# EAGLE board TXB0104_breakout_Panel_v10 (EAGLE 7.4.0), part 1 of 6
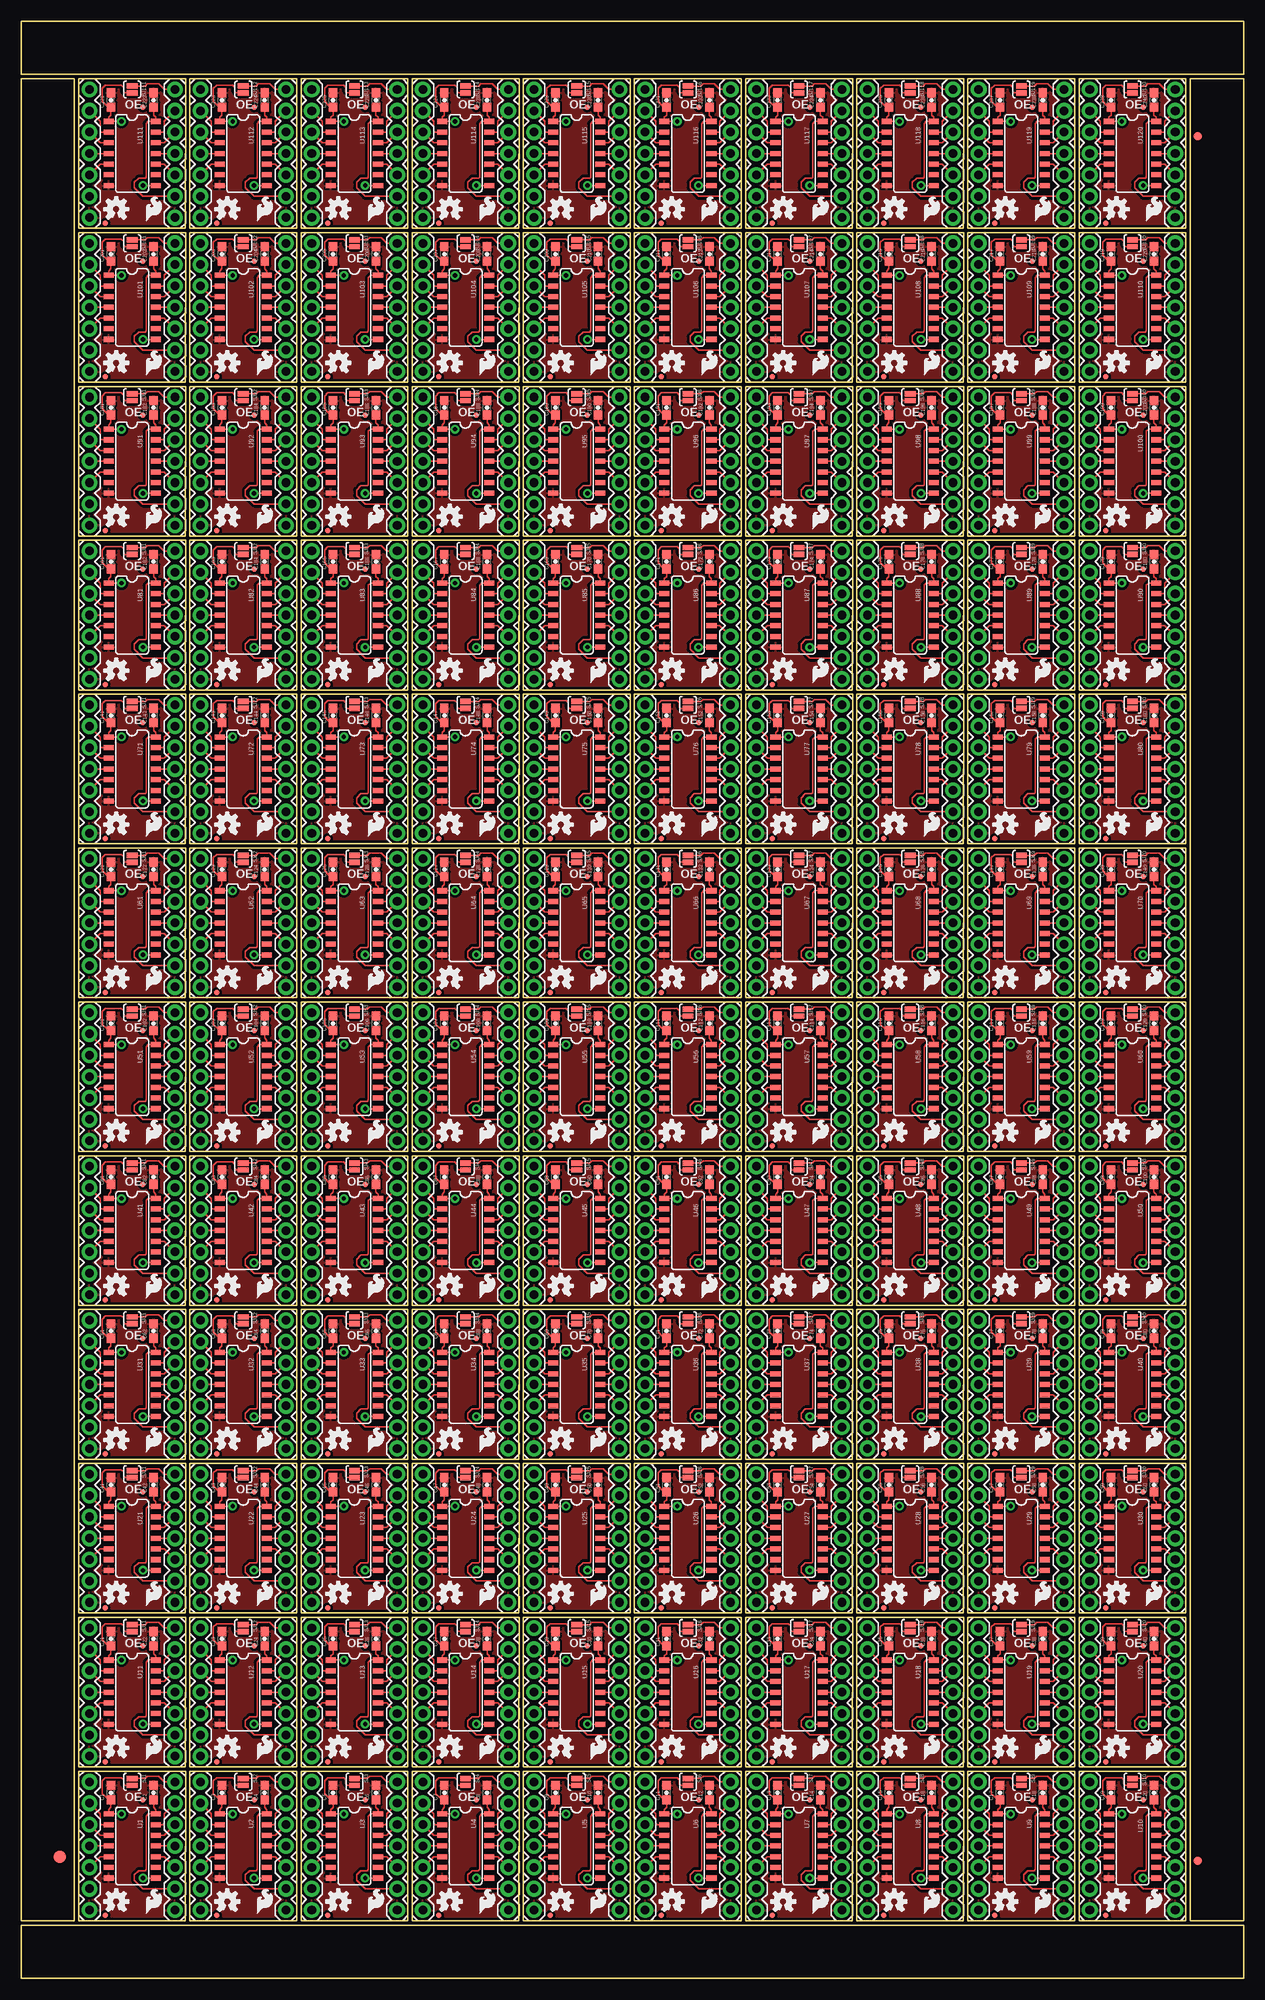
[diagram p0: board, top side]
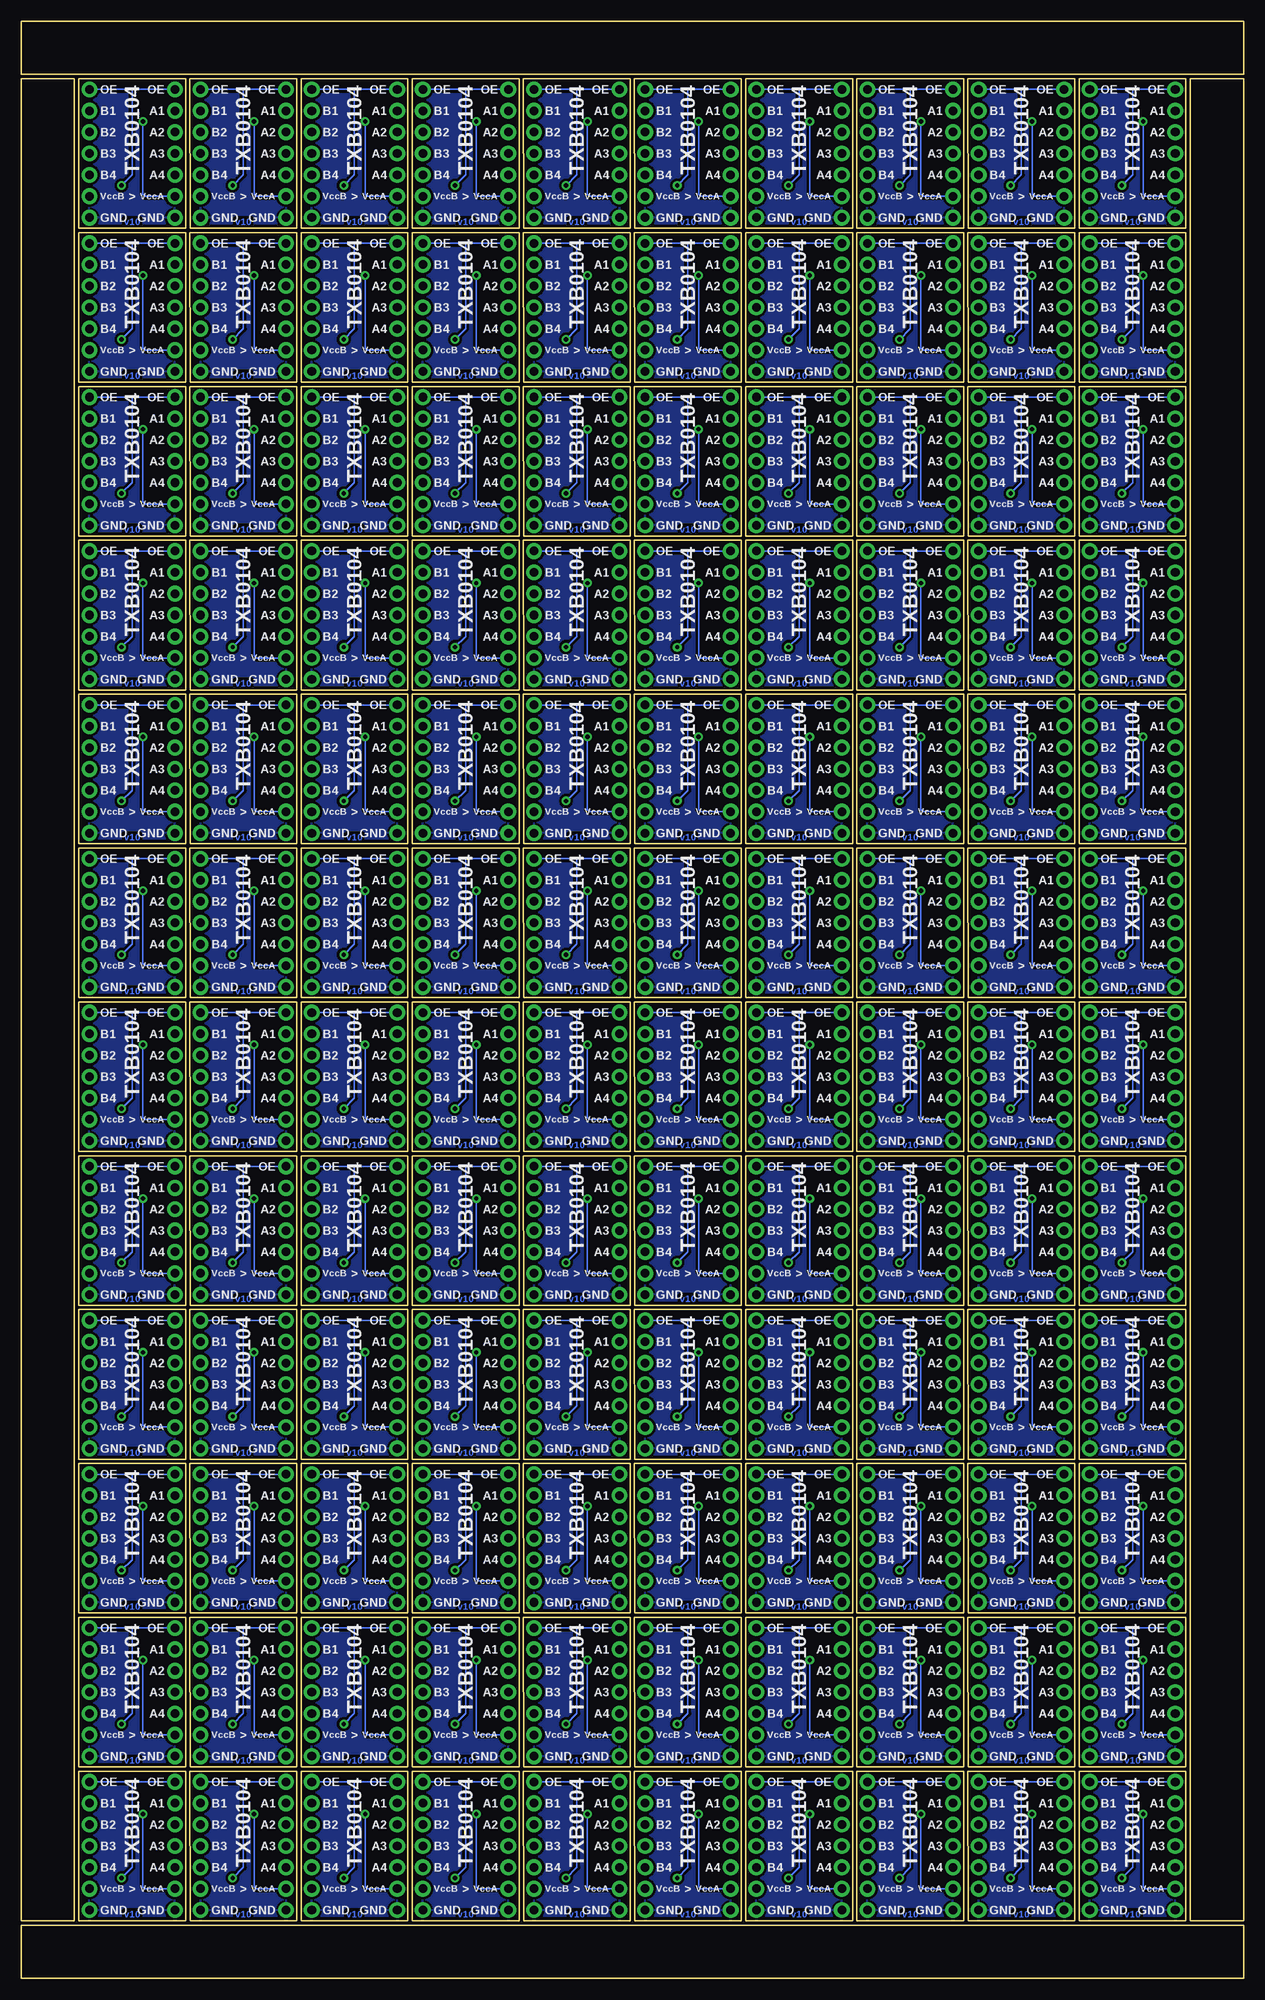
[diagram p1: board, bottom side, seen from below]

Size 145.29 x 232.66 mm. Coordinates in mm from the lower left corner, seen from the top.
Outline: 504 segments
Copper layers (1*16): Top 0.035mm / dielectric 1.5mm / Bottom 0.035mm
Design rules "Sparkfun": minimum track width 8mil, minimum drill 20mil, track to track 8mil, track to pad 8mil, pad to pad 8mil, via to via 8mil, smd to smd 8mil, copper to edge 8mil, drill to drill 8mil, minimum pad ring 12mil, minimum via ring 10mil, stop-mask expansion 4mil, vias tented up to drill 20mil, thermal gap 10mil

## Footprints (pad centres in the part's own frame; a part is rotated, then mirrored left to right if it is on the bottom)
0603-CAP = smd 1.1 x 1: 1 -0.85,0; 2 0.85,0
FIDUCIAL-1.5X3 = smd 1.5 x 1.5: 1 0,0
FIDUCIAL-1X2 = smd 1 x 1: 1 0,0
MICRO-FIDUCIAL = smd 0.635 x 0.635: 1 0,0
1X07 = drill 1.016 pad 1.88: 1 0,0; 2 2.54,0; 3 5.08,0; 4 7.62,0; 5 10.16,0; 6 12.7,0; 7 15.24,0
SJ_2S-NOTRACE = smd 0.635 x 1.27: 1 -0.401,0; 2 0.413,0
SO14 = smd 0.6 x 1.2: 1 -3.81,-2.8; 2 -2.54,-2.8; 3 -1.27,-2.8; 4 0,-2.8; 5 1.27,-2.8; 6 2.54,-2.8; 7 3.81,-2.8; 8 3.81,2.8; 9 2.54,2.8; 10 1.27,2.8; 11 0,2.8; 12 -1.27,2.8; 13 -2.54,2.8; 14 -3.81,2.8

## Placement (x,y rotation side)
C1  0.1uF  [0603-CAP]  10.67,22.1 90 top
C2  0.1uF  [0603-CAP]  15.75,22.1 90 top
C3  0.1uF  [0603-CAP]  23.88,22.1 90 top
C4  0.1uF  [0603-CAP]  28.96,22.1 90 top
C5  0.1uF  [0603-CAP]  37.08,22.1 90 top
C6  0.1uF  [0603-CAP]  42.16,22.1 90 top
C7  0.1uF  [0603-CAP]  50.29,22.1 90 top
C8  0.1uF  [0603-CAP]  55.37,22.1 90 top
C9  0.1uF  [0603-CAP]  63.5,22.1 90 top
C10  0.1uF  [0603-CAP]  68.58,22.1 90 top
C11  0.1uF  [0603-CAP]  76.71,22.1 90 top
C12  0.1uF  [0603-CAP]  81.79,22.1 90 top
C13  0.1uF  [0603-CAP]  89.92,22.1 90 top
C14  0.1uF  [0603-CAP]  95,22.1 90 top
C15  0.1uF  [0603-CAP]  103.12,22.1 90 top
C16  0.1uF  [0603-CAP]  108.2,22.1 90 top
C17  0.1uF  [0603-CAP]  116.33,22.1 90 top
C18  0.1uF  [0603-CAP]  121.41,22.1 90 top
C19  0.1uF  [0603-CAP]  129.54,22.1 90 top
C20  0.1uF  [0603-CAP]  134.62,22.1 90 top
C21  0.1uF  [0603-CAP]  10.67,40.39 90 top
C22  0.1uF  [0603-CAP]  15.75,40.39 90 top
C23  0.1uF  [0603-CAP]  23.88,40.39 90 top
C24  0.1uF  [0603-CAP]  28.96,40.39 90 top
C25  0.1uF  [0603-CAP]  37.08,40.39 90 top
C26  0.1uF  [0603-CAP]  42.16,40.39 90 top
C27  0.1uF  [0603-CAP]  50.29,40.39 90 top
C28  0.1uF  [0603-CAP]  55.37,40.39 90 top
C29  0.1uF  [0603-CAP]  63.5,40.39 90 top
C30  0.1uF  [0603-CAP]  68.58,40.39 90 top
C31  0.1uF  [0603-CAP]  76.71,40.39 90 top
C32  0.1uF  [0603-CAP]  81.79,40.39 90 top
C33  0.1uF  [0603-CAP]  89.92,40.39 90 top
C34  0.1uF  [0603-CAP]  95,40.39 90 top
C35  0.1uF  [0603-CAP]  103.12,40.39 90 top
C36  0.1uF  [0603-CAP]  108.2,40.39 90 top
C37  0.1uF  [0603-CAP]  116.33,40.39 90 top
C38  0.1uF  [0603-CAP]  121.41,40.39 90 top
C39  0.1uF  [0603-CAP]  129.54,40.39 90 top
C40  0.1uF  [0603-CAP]  134.62,40.39 90 top
C41  0.1uF  [0603-CAP]  10.67,58.67 90 top
C42  0.1uF  [0603-CAP]  15.75,58.67 90 top
C43  0.1uF  [0603-CAP]  23.88,58.67 90 top
C44  0.1uF  [0603-CAP]  28.96,58.67 90 top
C45  0.1uF  [0603-CAP]  37.08,58.67 90 top
C46  0.1uF  [0603-CAP]  42.16,58.67 90 top
C47  0.1uF  [0603-CAP]  50.29,58.67 90 top
C48  0.1uF  [0603-CAP]  55.37,58.67 90 top
C49  0.1uF  [0603-CAP]  63.5,58.67 90 top
C50  0.1uF  [0603-CAP]  68.58,58.67 90 top
C51  0.1uF  [0603-CAP]  76.71,58.67 90 top
C52  0.1uF  [0603-CAP]  81.79,58.67 90 top
C53  0.1uF  [0603-CAP]  89.92,58.67 90 top
C54  0.1uF  [0603-CAP]  95,58.67 90 top
C55  0.1uF  [0603-CAP]  103.12,58.67 90 top
C56  0.1uF  [0603-CAP]  108.2,58.67 90 top
C57  0.1uF  [0603-CAP]  116.33,58.67 90 top
C58  0.1uF  [0603-CAP]  121.41,58.67 90 top
C59  0.1uF  [0603-CAP]  129.54,58.67 90 top
C60  0.1uF  [0603-CAP]  134.62,58.67 90 top
C61  0.1uF  [0603-CAP]  10.67,76.96 90 top
C62  0.1uF  [0603-CAP]  15.75,76.96 90 top
C63  0.1uF  [0603-CAP]  23.88,76.96 90 top
C64  0.1uF  [0603-CAP]  28.96,76.96 90 top
C65  0.1uF  [0603-CAP]  37.08,76.96 90 top
C66  0.1uF  [0603-CAP]  42.16,76.96 90 top
C67  0.1uF  [0603-CAP]  50.29,76.96 90 top
C68  0.1uF  [0603-CAP]  55.37,76.96 90 top
C69  0.1uF  [0603-CAP]  63.5,76.96 90 top
C70  0.1uF  [0603-CAP]  68.58,76.96 90 top
C71  0.1uF  [0603-CAP]  76.71,76.96 90 top
C72  0.1uF  [0603-CAP]  81.79,76.96 90 top
C73  0.1uF  [0603-CAP]  89.92,76.96 90 top
C74  0.1uF  [0603-CAP]  95,76.96 90 top
C75  0.1uF  [0603-CAP]  103.12,76.96 90 top
C76  0.1uF  [0603-CAP]  108.2,76.96 90 top
C77  0.1uF  [0603-CAP]  116.33,76.96 90 top
C78  0.1uF  [0603-CAP]  121.41,76.96 90 top
C79  0.1uF  [0603-CAP]  129.54,76.96 90 top
C80  0.1uF  [0603-CAP]  134.62,76.96 90 top
C81  0.1uF  [0603-CAP]  10.67,95.25 90 top
C82  0.1uF  [0603-CAP]  15.75,95.25 90 top
C83  0.1uF  [0603-CAP]  23.88,95.25 90 top
C84  0.1uF  [0603-CAP]  28.96,95.25 90 top
C85  0.1uF  [0603-CAP]  37.08,95.25 90 top
C86  0.1uF  [0603-CAP]  42.16,95.25 90 top
C87  0.1uF  [0603-CAP]  50.29,95.25 90 top
C88  0.1uF  [0603-CAP]  55.37,95.25 90 top
C89  0.1uF  [0603-CAP]  63.5,95.25 90 top
C90  0.1uF  [0603-CAP]  68.58,95.25 90 top
C91  0.1uF  [0603-CAP]  76.71,95.25 90 top
C92  0.1uF  [0603-CAP]  81.79,95.25 90 top
C93  0.1uF  [0603-CAP]  89.92,95.25 90 top
C94  0.1uF  [0603-CAP]  95,95.25 90 top
C95  0.1uF  [0603-CAP]  103.12,95.25 90 top
C96  0.1uF  [0603-CAP]  108.2,95.25 90 top
C97  0.1uF  [0603-CAP]  116.33,95.25 90 top
C98  0.1uF  [0603-CAP]  121.41,95.25 90 top
C99  0.1uF  [0603-CAP]  129.54,95.25 90 top
C100  0.1uF  [0603-CAP]  134.62,95.25 90 top
C101  0.1uF  [0603-CAP]  10.67,113.54 90 top
C102  0.1uF  [0603-CAP]  15.75,113.54 90 top
C103  0.1uF  [0603-CAP]  23.88,113.54 90 top
C104  0.1uF  [0603-CAP]  28.96,113.54 90 top
C105  0.1uF  [0603-CAP]  37.08,113.54 90 top
C106  0.1uF  [0603-CAP]  42.16,113.54 90 top
C107  0.1uF  [0603-CAP]  50.29,113.54 90 top
C108  0.1uF  [0603-CAP]  55.37,113.54 90 top
C109  0.1uF  [0603-CAP]  63.5,113.54 90 top
C110  0.1uF  [0603-CAP]  68.58,113.54 90 top
C111  0.1uF  [0603-CAP]  76.71,113.54 90 top
C112  0.1uF  [0603-CAP]  81.79,113.54 90 top
C113  0.1uF  [0603-CAP]  89.92,113.54 90 top
C114  0.1uF  [0603-CAP]  95,113.54 90 top
C115  0.1uF  [0603-CAP]  103.12,113.54 90 top
C116  0.1uF  [0603-CAP]  108.2,113.54 90 top
C117  0.1uF  [0603-CAP]  116.33,113.54 90 top
C118  0.1uF  [0603-CAP]  121.41,113.54 90 top
C119  0.1uF  [0603-CAP]  129.54,113.54 90 top
C120  0.1uF  [0603-CAP]  134.62,113.54 90 top
C121  0.1uF  [0603-CAP]  10.67,131.83 90 top
C122  0.1uF  [0603-CAP]  15.75,131.83 90 top
C123  0.1uF  [0603-CAP]  23.88,131.83 90 top
C124  0.1uF  [0603-CAP]  28.96,131.83 90 top
C125  0.1uF  [0603-CAP]  37.08,131.83 90 top
C126  0.1uF  [0603-CAP]  42.16,131.83 90 top
C127  0.1uF  [0603-CAP]  50.29,131.83 90 top
C128  0.1uF  [0603-CAP]  55.37,131.83 90 top
C129  0.1uF  [0603-CAP]  63.5,131.83 90 top
C130  0.1uF  [0603-CAP]  68.58,131.83 90 top
C131  0.1uF  [0603-CAP]  76.71,131.83 90 top
C132  0.1uF  [0603-CAP]  81.79,131.83 90 top
C133  0.1uF  [0603-CAP]  89.92,131.83 90 top
C134  0.1uF  [0603-CAP]  95,131.83 90 top
C135  0.1uF  [0603-CAP]  103.12,131.83 90 top
C136  0.1uF  [0603-CAP]  108.2,131.83 90 top
C137  0.1uF  [0603-CAP]  116.33,131.83 90 top
C138  0.1uF  [0603-CAP]  121.41,131.83 90 top
C139  0.1uF  [0603-CAP]  129.54,131.83 90 top
C140  0.1uF  [0603-CAP]  134.62,131.83 90 top
C141  0.1uF  [0603-CAP]  10.67,150.11 90 top
C142  0.1uF  [0603-CAP]  15.75,150.11 90 top
C143  0.1uF  [0603-CAP]  23.88,150.11 90 top
C144  0.1uF  [0603-CAP]  28.96,150.11 90 top
C145  0.1uF  [0603-CAP]  37.08,150.11 90 top
C146  0.1uF  [0603-CAP]  42.16,150.11 90 top
C147  0.1uF  [0603-CAP]  50.29,150.11 90 top
C148  0.1uF  [0603-CAP]  55.37,150.11 90 top
C149  0.1uF  [0603-CAP]  63.5,150.11 90 top
C150  0.1uF  [0603-CAP]  68.58,150.11 90 top
C151  0.1uF  [0603-CAP]  76.71,150.11 90 top
C152  0.1uF  [0603-CAP]  81.79,150.11 90 top
C153  0.1uF  [0603-CAP]  89.92,150.11 90 top
C154  0.1uF  [0603-CAP]  95,150.11 90 top
C155  0.1uF  [0603-CAP]  103.12,150.11 90 top
C156  0.1uF  [0603-CAP]  108.2,150.11 90 top
C157  0.1uF  [0603-CAP]  116.33,150.11 90 top
C158  0.1uF  [0603-CAP]  121.41,150.11 90 top
C159  0.1uF  [0603-CAP]  129.54,150.11 90 top
C160  0.1uF  [0603-CAP]  134.62,150.11 90 top
C161  0.1uF  [0603-CAP]  10.67,168.4 90 top
C162  0.1uF  [0603-CAP]  15.75,168.4 90 top
C163  0.1uF  [0603-CAP]  23.88,168.4 90 top
C164  0.1uF  [0603-CAP]  28.96,168.4 90 top
C165  0.1uF  [0603-CAP]  37.08,168.4 90 top
C166  0.1uF  [0603-CAP]  42.16,168.4 90 top
C167  0.1uF  [0603-CAP]  50.29,168.4 90 top
C168  0.1uF  [0603-CAP]  55.37,168.4 90 top
C169  0.1uF  [0603-CAP]  63.5,168.4 90 top
C170  0.1uF  [0603-CAP]  68.58,168.4 90 top
C171  0.1uF  [0603-CAP]  76.71,168.4 90 top
C172  0.1uF  [0603-CAP]  81.79,168.4 90 top
C173  0.1uF  [0603-CAP]  89.92,168.4 90 top
C174  0.1uF  [0603-CAP]  95,168.4 90 top
C175  0.1uF  [0603-CAP]  103.12,168.4 90 top
C176  0.1uF  [0603-CAP]  108.2,168.4 90 top
C177  0.1uF  [0603-CAP]  116.33,168.4 90 top
C178  0.1uF  [0603-CAP]  121.41,168.4 90 top
C179  0.1uF  [0603-CAP]  129.54,168.4 90 top
C180  0.1uF  [0603-CAP]  134.62,168.4 90 top
C181  0.1uF  [0603-CAP]  10.67,186.69 90 top
C182  0.1uF  [0603-CAP]  15.75,186.69 90 top
C183  0.1uF  [0603-CAP]  23.88,186.69 90 top
C184  0.1uF  [0603-CAP]  28.96,186.69 90 top
C185  0.1uF  [0603-CAP]  37.08,186.69 90 top
C186  0.1uF  [0603-CAP]  42.16,186.69 90 top
C187  0.1uF  [0603-CAP]  50.29,186.69 90 top
C188  0.1uF  [0603-CAP]  55.37,186.69 90 top
C189  0.1uF  [0603-CAP]  63.5,186.69 90 top
C190  0.1uF  [0603-CAP]  68.58,186.69 90 top
C191  0.1uF  [0603-CAP]  76.71,186.69 90 top
C192  0.1uF  [0603-CAP]  81.79,186.69 90 top
C193  0.1uF  [0603-CAP]  89.92,186.69 90 top
C194  0.1uF  [0603-CAP]  95,186.69 90 top
C195  0.1uF  [0603-CAP]  103.12,186.69 90 top
C196  0.1uF  [0603-CAP]  108.2,186.69 90 top
C197  0.1uF  [0603-CAP]  116.33,186.69 90 top
C198  0.1uF  [0603-CAP]  121.41,186.69 90 top
C199  0.1uF  [0603-CAP]  129.54,186.69 90 top
C200  0.1uF  [0603-CAP]  134.62,186.69 90 top
C201  0.1uF  [0603-CAP]  10.67,204.98 90 top
C202  0.1uF  [0603-CAP]  15.75,204.98 90 top
C203  0.1uF  [0603-CAP]  23.88,204.98 90 top
C204  0.1uF  [0603-CAP]  28.96,204.98 90 top
C205  0.1uF  [0603-CAP]  37.08,204.98 90 top
C206  0.1uF  [0603-CAP]  42.16,204.98 90 top
C207  0.1uF  [0603-CAP]  50.29,204.98 90 top
C208  0.1uF  [0603-CAP]  55.37,204.98 90 top
C209  0.1uF  [0603-CAP]  63.5,204.98 90 top
C210  0.1uF  [0603-CAP]  68.58,204.98 90 top
C211  0.1uF  [0603-CAP]  76.71,204.98 90 top
C212  0.1uF  [0603-CAP]  81.79,204.98 90 top
C213  0.1uF  [0603-CAP]  89.92,204.98 90 top
C214  0.1uF  [0603-CAP]  95,204.98 90 top
C215  0.1uF  [0603-CAP]  103.12,204.98 90 top
C216  0.1uF  [0603-CAP]  108.2,204.98 90 top
C217  0.1uF  [0603-CAP]  116.33,204.98 90 top
C218  0.1uF  [0603-CAP]  121.41,204.98 90 top
C219  0.1uF  [0603-CAP]  129.54,204.98 90 top
C220  0.1uF  [0603-CAP]  134.62,204.98 90 top
C221  0.1uF  [0603-CAP]  10.67,223.27 90 top
C222  0.1uF  [0603-CAP]  15.75,223.27 90 top
C223  0.1uF  [0603-CAP]  23.88,223.27 90 top
C224  0.1uF  [0603-CAP]  28.96,223.27 90 top
C225  0.1uF  [0603-CAP]  37.08,223.27 90 top
C226  0.1uF  [0603-CAP]  42.16,223.27 90 top
C227  0.1uF  [0603-CAP]  50.29,223.27 90 top
C228  0.1uF  [0603-CAP]  55.37,223.27 90 top
C229  0.1uF  [0603-CAP]  63.5,223.27 90 top
C230  0.1uF  [0603-CAP]  68.58,223.27 90 top
C231  0.1uF  [0603-CAP]  76.71,223.27 90 top
C232  0.1uF  [0603-CAP]  81.79,223.27 90 top
C233  0.1uF  [0603-CAP]  89.92,223.27 90 top
C234  0.1uF  [0603-CAP]  95,223.27 90 top
C235  0.1uF  [0603-CAP]  103.12,223.27 90 top
C236  0.1uF  [0603-CAP]  108.2,223.27 90 top
C237  0.1uF  [0603-CAP]  116.33,223.27 90 top
C238  0.1uF  [0603-CAP]  121.41,223.27 90 top
C239  0.1uF  [0603-CAP]  129.54,223.27 90 top
C240  0.1uF  [0603-CAP]  134.62,223.27 90 top
E$1  [FIDUCIAL-1.5X3]  4.57,14.48 0 top
E$7  [FIDUCIAL-1X2]  139.83,218.95 180 top
E$8  [FIDUCIAL-1X2]  139.83,13.97 0 top
FID1  FIDUCIALUFIDUCIAL  [MICRO-FIDUCIAL]  14.48,21.23 0 top
FID2  FIDUCIALUFIDUCIAL  [MICRO-FIDUCIAL]  10.03,7.49 0 top
FID3  FIDUCIALUFIDUCIAL  [MICRO-FIDUCIAL]  27.69,21.23 0 top
FID4  FIDUCIALUFIDUCIAL  [MICRO-FIDUCIAL]  23.24,7.49 0 top
FID5  FIDUCIALUFIDUCIAL  [MICRO-FIDUCIAL]  40.89,21.23 0 top
FID6  FIDUCIALUFIDUCIAL  [MICRO-FIDUCIAL]  36.45,7.49 0 top
FID7  FIDUCIALUFIDUCIAL  [MICRO-FIDUCIAL]  54.1,21.23 0 top
FID8  FIDUCIALUFIDUCIAL  [MICRO-FIDUCIAL]  49.66,7.49 0 top
FID9  FIDUCIALUFIDUCIAL  [MICRO-FIDUCIAL]  67.31,21.23 0 top
FID10  FIDUCIALUFIDUCIAL  [MICRO-FIDUCIAL]  62.87,7.49 0 top
FID11  FIDUCIALUFIDUCIAL  [MICRO-FIDUCIAL]  80.52,21.23 0 top
FID12  FIDUCIALUFIDUCIAL  [MICRO-FIDUCIAL]  76.07,7.49 0 top
FID13  FIDUCIALUFIDUCIAL  [MICRO-FIDUCIAL]  93.73,21.23 0 top
FID14  FIDUCIALUFIDUCIAL  [MICRO-FIDUCIAL]  89.28,7.49 0 top
FID15  FIDUCIALUFIDUCIAL  [MICRO-FIDUCIAL]  106.93,21.23 0 top
FID16  FIDUCIALUFIDUCIAL  [MICRO-FIDUCIAL]  102.49,7.49 0 top
FID17  FIDUCIALUFIDUCIAL  [MICRO-FIDUCIAL]  120.14,21.23 0 top
FID18  FIDUCIALUFIDUCIAL  [MICRO-FIDUCIAL]  115.7,7.49 0 top
FID19  FIDUCIALUFIDUCIAL  [MICRO-FIDUCIAL]  133.35,21.23 0 top
FID20  FIDUCIALUFIDUCIAL  [MICRO-FIDUCIAL]  128.91,7.49 0 top
FID21  FIDUCIALUFIDUCIAL  [MICRO-FIDUCIAL]  14.48,39.52 0 top
FID22  FIDUCIALUFIDUCIAL  [MICRO-FIDUCIAL]  10.03,25.78 0 top
FID23  FIDUCIALUFIDUCIAL  [MICRO-FIDUCIAL]  27.69,39.52 0 top
FID24  FIDUCIALUFIDUCIAL  [MICRO-FIDUCIAL]  23.24,25.78 0 top
FID25  FIDUCIALUFIDUCIAL  [MICRO-FIDUCIAL]  40.89,39.52 0 top
FID26  FIDUCIALUFIDUCIAL  [MICRO-FIDUCIAL]  36.45,25.78 0 top
FID27  FIDUCIALUFIDUCIAL  [MICRO-FIDUCIAL]  54.1,39.52 0 top
FID28  FIDUCIALUFIDUCIAL  [MICRO-FIDUCIAL]  49.66,25.78 0 top
FID29  FIDUCIALUFIDUCIAL  [MICRO-FIDUCIAL]  67.31,39.52 0 top
FID30  FIDUCIALUFIDUCIAL  [MICRO-FIDUCIAL]  62.87,25.78 0 top
FID31  FIDUCIALUFIDUCIAL  [MICRO-FIDUCIAL]  80.52,39.52 0 top
FID32  FIDUCIALUFIDUCIAL  [MICRO-FIDUCIAL]  76.07,25.78 0 top
FID33  FIDUCIALUFIDUCIAL  [MICRO-FIDUCIAL]  93.73,39.52 0 top
FID34  FIDUCIALUFIDUCIAL  [MICRO-FIDUCIAL]  89.28,25.78 0 top
FID35  FIDUCIALUFIDUCIAL  [MICRO-FIDUCIAL]  106.93,39.52 0 top
FID36  FIDUCIALUFIDUCIAL  [MICRO-FIDUCIAL]  102.49,25.78 0 top
FID37  FIDUCIALUFIDUCIAL  [MICRO-FIDUCIAL]  120.14,39.52 0 top
FID38  FIDUCIALUFIDUCIAL  [MICRO-FIDUCIAL]  115.7,25.78 0 top
FID39  FIDUCIALUFIDUCIAL  [MICRO-FIDUCIAL]  133.35,39.52 0 top
FID40  FIDUCIALUFIDUCIAL  [MICRO-FIDUCIAL]  128.91,25.78 0 top
FID41  FIDUCIALUFIDUCIAL  [MICRO-FIDUCIAL]  14.48,57.81 0 top
FID42  FIDUCIALUFIDUCIAL  [MICRO-FIDUCIAL]  10.03,44.07 0 top
FID43  FIDUCIALUFIDUCIAL  [MICRO-FIDUCIAL]  27.69,57.81 0 top
FID44  FIDUCIALUFIDUCIAL  [MICRO-FIDUCIAL]  23.24,44.07 0 top
FID45  FIDUCIALUFIDUCIAL  [MICRO-FIDUCIAL]  40.89,57.81 0 top
FID46  FIDUCIALUFIDUCIAL  [MICRO-FIDUCIAL]  36.45,44.07 0 top
FID47  FIDUCIALUFIDUCIAL  [MICRO-FIDUCIAL]  54.1,57.81 0 top
FID48  FIDUCIALUFIDUCIAL  [MICRO-FIDUCIAL]  49.66,44.07 0 top
FID49  FIDUCIALUFIDUCIAL  [MICRO-FIDUCIAL]  67.31,57.81 0 top
FID50  FIDUCIALUFIDUCIAL  [MICRO-FIDUCIAL]  62.87,44.07 0 top
FID51  FIDUCIALUFIDUCIAL  [MICRO-FIDUCIAL]  80.52,57.81 0 top
FID52  FIDUCIALUFIDUCIAL  [MICRO-FIDUCIAL]  76.07,44.07 0 top
FID53  FIDUCIALUFIDUCIAL  [MICRO-FIDUCIAL]  93.73,57.81 0 top
FID54  FIDUCIALUFIDUCIAL  [MICRO-FIDUCIAL]  89.28,44.07 0 top
FID55  FIDUCIALUFIDUCIAL  [MICRO-FIDUCIAL]  106.93,57.81 0 top
FID56  FIDUCIALUFIDUCIAL  [MICRO-FIDUCIAL]  102.49,44.07 0 top
FID57  FIDUCIALUFIDUCIAL  [MICRO-FIDUCIAL]  120.14,57.81 0 top
FID58  FIDUCIALUFIDUCIAL  [MICRO-FIDUCIAL]  115.7,44.07 0 top
FID59  FIDUCIALUFIDUCIAL  [MICRO-FIDUCIAL]  133.35,57.81 0 top
FID60  FIDUCIALUFIDUCIAL  [MICRO-FIDUCIAL]  128.91,44.07 0 top
FID61  FIDUCIALUFIDUCIAL  [MICRO-FIDUCIAL]  14.48,76.1 0 top
FID62  FIDUCIALUFIDUCIAL  [MICRO-FIDUCIAL]  10.03,62.36 0 top
FID63  FIDUCIALUFIDUCIAL  [MICRO-FIDUCIAL]  27.69,76.1 0 top
FID64  FIDUCIALUFIDUCIAL  [MICRO-FIDUCIAL]  23.24,62.36 0 top
FID65  FIDUCIALUFIDUCIAL  [MICRO-FIDUCIAL]  40.89,76.1 0 top
FID66  FIDUCIALUFIDUCIAL  [MICRO-FIDUCIAL]  36.45,62.36 0 top
FID67  FIDUCIALUFIDUCIAL  [MICRO-FIDUCIAL]  54.1,76.1 0 top
FID68  FIDUCIALUFIDUCIAL  [MICRO-FIDUCIAL]  49.66,62.36 0 top
FID69  FIDUCIALUFIDUCIAL  [MICRO-FIDUCIAL]  67.31,76.1 0 top
FID70  FIDUCIALUFIDUCIAL  [MICRO-FIDUCIAL]  62.87,62.36 0 top
FID71  FIDUCIALUFIDUCIAL  [MICRO-FIDUCIAL]  80.52,76.1 0 top
FID72  FIDUCIALUFIDUCIAL  [MICRO-FIDUCIAL]  76.07,62.36 0 top
FID73  FIDUCIALUFIDUCIAL  [MICRO-FIDUCIAL]  93.73,76.1 0 top
FID74  FIDUCIALUFIDUCIAL  [MICRO-FIDUCIAL]  89.28,62.36 0 top
FID75  FIDUCIALUFIDUCIAL  [MICRO-FIDUCIAL]  106.93,76.1 0 top
FID76  FIDUCIALUFIDUCIAL  [MICRO-FIDUCIAL]  102.49,62.36 0 top
FID77  FIDUCIALUFIDUCIAL  [MICRO-FIDUCIAL]  120.14,76.1 0 top
FID78  FIDUCIALUFIDUCIAL  [MICRO-FIDUCIAL]  115.7,62.36 0 top
FID79  FIDUCIALUFIDUCIAL  [MICRO-FIDUCIAL]  133.35,76.1 0 top
FID80  FIDUCIALUFIDUCIAL  [MICRO-FIDUCIAL]  128.91,62.36 0 top
FID81  FIDUCIALUFIDUCIAL  [MICRO-FIDUCIAL]  14.48,94.39 0 top
FID82  FIDUCIALUFIDUCIAL  [MICRO-FIDUCIAL]  10.03,80.64 0 top
FID83  FIDUCIALUFIDUCIAL  [MICRO-FIDUCIAL]  27.69,94.39 0 top
FID84  FIDUCIALUFIDUCIAL  [MICRO-FIDUCIAL]  23.24,80.64 0 top
FID85  FIDUCIALUFIDUCIAL  [MICRO-FIDUCIAL]  40.89,94.39 0 top
FID86  FIDUCIALUFIDUCIAL  [MICRO-FIDUCIAL]  36.45,80.64 0 top
FID87  FIDUCIALUFIDUCIAL  [MICRO-FIDUCIAL]  54.1,94.39 0 top
FID88  FIDUCIALUFIDUCIAL  [MICRO-FIDUCIAL]  49.66,80.64 0 top
FID89  FIDUCIALUFIDUCIAL  [MICRO-FIDUCIAL]  67.31,94.39 0 top
FID90  FIDUCIALUFIDUCIAL  [MICRO-FIDUCIAL]  62.87,80.64 0 top
FID91  FIDUCIALUFIDUCIAL  [MICRO-FIDUCIAL]  80.52,94.39 0 top
FID92  FIDUCIALUFIDUCIAL  [MICRO-FIDUCIAL]  76.07,80.64 0 top
FID93  FIDUCIALUFIDUCIAL  [MICRO-FIDUCIAL]  93.73,94.39 0 top
FID94  FIDUCIALUFIDUCIAL  [MICRO-FIDUCIAL]  89.28,80.64 0 top
FID95  FIDUCIALUFIDUCIAL  [MICRO-FIDUCIAL]  106.93,94.39 0 top
FID96  FIDUCIALUFIDUCIAL  [MICRO-FIDUCIAL]  102.49,80.64 0 top
FID97  FIDUCIALUFIDUCIAL  [MICRO-FIDUCIAL]  120.14,94.39 0 top
FID98  FIDUCIALUFIDUCIAL  [MICRO-FIDUCIAL]  115.7,80.64 0 top
FID99  FIDUCIALUFIDUCIAL  [MICRO-FIDUCIAL]  133.35,94.39 0 top
FID100  FIDUCIALUFIDUCIAL  [MICRO-FIDUCIAL]  128.91,80.64 0 top
FID101  FIDUCIALUFIDUCIAL  [MICRO-FIDUCIAL]  14.48,112.67 0 top
FID102  FIDUCIALUFIDUCIAL  [MICRO-FIDUCIAL]  10.03,98.93 0 top
FID103  FIDUCIALUFIDUCIAL  [MICRO-FIDUCIAL]  27.69,112.67 0 top
FID104  FIDUCIALUFIDUCIAL  [MICRO-FIDUCIAL]  23.24,98.93 0 top
FID105  FIDUCIALUFIDUCIAL  [MICRO-FIDUCIAL]  40.89,112.67 0 top
FID106  FIDUCIALUFIDUCIAL  [MICRO-FIDUCIAL]  36.45,98.93 0 top
FID107  FIDUCIALUFIDUCIAL  [MICRO-FIDUCIAL]  54.1,112.67 0 top
FID108  FIDUCIALUFIDUCIAL  [MICRO-FIDUCIAL]  49.66,98.93 0 top
FID109  FIDUCIALUFIDUCIAL  [MICRO-FIDUCIAL]  67.31,112.67 0 top
FID110  FIDUCIALUFIDUCIAL  [MICRO-FIDUCIAL]  62.87,98.93 0 top
FID111  FIDUCIALUFIDUCIAL  [MICRO-FIDUCIAL]  80.52,112.67 0 top
FID112  FIDUCIALUFIDUCIAL  [MICRO-FIDUCIAL]  76.07,98.93 0 top
FID113  FIDUCIALUFIDUCIAL  [MICRO-FIDUCIAL]  93.73,112.67 0 top
FID114  FIDUCIALUFIDUCIAL  [MICRO-FIDUCIAL]  89.28,98.93 0 top
FID115  FIDUCIALUFIDUCIAL  [MICRO-FIDUCIAL]  106.93,112.67 0 top
FID116  FIDUCIALUFIDUCIAL  [MICRO-FIDUCIAL]  102.49,98.93 0 top
FID117  FIDUCIALUFIDUCIAL  [MICRO-FIDUCIAL]  120.14,112.67 0 top
FID118  FIDUCIALUFIDUCIAL  [MICRO-FIDUCIAL]  115.7,98.93 0 top
FID119  FIDUCIALUFIDUCIAL  [MICRO-FIDUCIAL]  133.35,112.67 0 top
FID120  FIDUCIALUFIDUCIAL  [MICRO-FIDUCIAL]  128.91,98.93 0 top
FID121  FIDUCIALUFIDUCIAL  [MICRO-FIDUCIAL]  14.48,130.96 0 top
FID122  FIDUCIALUFIDUCIAL  [MICRO-FIDUCIAL]  10.03,117.22 0 top
FID123  FIDUCIALUFIDUCIAL  [MICRO-FIDUCIAL]  27.69,130.96 0 top
FID124  FIDUCIALUFIDUCIAL  [MICRO-FIDUCIAL]  23.24,117.22 0 top
FID125  FIDUCIALUFIDUCIAL  [MICRO-FIDUCIAL]  40.89,130.96 0 top
FID126  FIDUCIALUFIDUCIAL  [MICRO-FIDUCIAL]  36.45,117.22 0 top
FID127  FIDUCIALUFIDUCIAL  [MICRO-FIDUCIAL]  54.1,130.96 0 top
FID128  FIDUCIALUFIDUCIAL  [MICRO-FIDUCIAL]  49.66,117.22 0 top
FID129  FIDUCIALUFIDUCIAL  [MICRO-FIDUCIAL]  67.31,130.96 0 top
FID130  FIDUCIALUFIDUCIAL  [MICRO-FIDUCIAL]  62.87,117.22 0 top
FID131  FIDUCIALUFIDUCIAL  [MICRO-FIDUCIAL]  80.52,130.96 0 top
FID132  FIDUCIALUFIDUCIAL  [MICRO-FIDUCIAL]  76.07,117.22 0 top
FID133  FIDUCIALUFIDUCIAL  [MICRO-FIDUCIAL]  93.73,130.96 0 top
FID134  FIDUCIALUFIDUCIAL  [MICRO-FIDUCIAL]  89.28,117.22 0 top
FID135  FIDUCIALUFIDUCIAL  [MICRO-FIDUCIAL]  106.93,130.96 0 top
FID136  FIDUCIALUFIDUCIAL  [MICRO-FIDUCIAL]  102.49,117.22 0 top
FID137  FIDUCIALUFIDUCIAL  [MICRO-FIDUCIAL]  120.14,130.96 0 top
FID138  FIDUCIALUFIDUCIAL  [MICRO-FIDUCIAL]  115.7,117.22 0 top
FID139  FIDUCIALUFIDUCIAL  [MICRO-FIDUCIAL]  133.35,130.96 0 top
FID140  FIDUCIALUFIDUCIAL  [MICRO-FIDUCIAL]  128.91,117.22 0 top
FID141  FIDUCIALUFIDUCIAL  [MICRO-FIDUCIAL]  14.48,149.25 0 top
FID142  FIDUCIALUFIDUCIAL  [MICRO-FIDUCIAL]  10.03,135.51 0 top
FID143  FIDUCIALUFIDUCIAL  [MICRO-FIDUCIAL]  27.69,149.25 0 top
FID144  FIDUCIALUFIDUCIAL  [MICRO-FIDUCIAL]  23.24,135.51 0 top
FID145  FIDUCIALUFIDUCIAL  [MICRO-FIDUCIAL]  40.89,149.25 0 top
FID146  FIDUCIALUFIDUCIAL  [MICRO-FIDUCIAL]  36.45,135.51 0 top
FID147  FIDUCIALUFIDUCIAL  [MICRO-FIDUCIAL]  54.1,149.25 0 top
FID148  FIDUCIALUFIDUCIAL  [MICRO-FIDUCIAL]  49.66,135.51 0 top
FID149  FIDUCIALUFIDUCIAL  [MICRO-FIDUCIAL]  67.31,149.25 0 top
FID150  FIDUCIALUFIDUCIAL  [MICRO-FIDUCIAL]  62.87,135.51 0 top
FID151  FIDUCIALUFIDUCIAL  [MICRO-FIDUCIAL]  80.52,149.25 0 top
FID152  FIDUCIALUFIDUCIAL  [MICRO-FIDUCIAL]  76.07,135.51 0 top
FID153  FIDUCIALUFIDUCIAL  [MICRO-FIDUCIAL]  93.73,149.25 0 top
FID154  FIDUCIALUFIDUCIAL  [MICRO-FIDUCIAL]  89.28,135.51 0 top
FID155  FIDUCIALUFIDUCIAL  [MICRO-FIDUCIAL]  106.93,149.25 0 top
FID156  FIDUCIALUFIDUCIAL  [MICRO-FIDUCIAL]  102.49,135.51 0 top
FID157  FIDUCIALUFIDUCIAL  [MICRO-FIDUCIAL]  120.14,149.25 0 top
FID158  FIDUCIALUFIDUCIAL  [MICRO-FIDUCIAL]  115.7,135.51 0 top
FID159  FIDUCIALUFIDUCIAL  [MICRO-FIDUCIAL]  133.35,149.25 0 top
FID160  FIDUCIALUFIDUCIAL  [MICRO-FIDUCIAL]  128.91,135.51 0 top
FID161  FIDUCIALUFIDUCIAL  [MICRO-FIDUCIAL]  14.48,167.54 0 top
FID162  FIDUCIALUFIDUCIAL  [MICRO-FIDUCIAL]  10.03,153.8 0 top
FID163  FIDUCIALUFIDUCIAL  [MICRO-FIDUCIAL]  27.69,167.54 0 top
FID164  FIDUCIALUFIDUCIAL  [MICRO-FIDUCIAL]  23.24,153.8 0 top
FID165  FIDUCIALUFIDUCIAL  [MICRO-FIDUCIAL]  40.89,167.54 0 top
FID166  FIDUCIALUFIDUCIAL  [MICRO-FIDUCIAL]  36.45,153.8 0 top
FID167  FIDUCIALUFIDUCIAL  [MICRO-FIDUCIAL]  54.1,167.54 0 top
FID168  FIDUCIALUFIDUCIAL  [MICRO-FIDUCIAL]  49.66,153.8 0 top
FID169  FIDUCIALUFIDUCIAL  [MICRO-FIDUCIAL]  67.31,167.54 0 top
FID170  FIDUCIALUFIDUCIAL  [MICRO-FIDUCIAL]  62.87,153.8 0 top
FID171  FIDUCIALUFIDUCIAL  [MICRO-FIDUCIAL]  80.52,167.54 0 top
FID172  FIDUCIALUFIDUCIAL  [MICRO-FIDUCIAL]  76.07,153.8 0 top
FID173  FIDUCIALUFIDUCIAL  [MICRO-FIDUCIAL]  93.73,167.54 0 top
FID174  FIDUCIALUFIDUCIAL  [MICRO-FIDUCIAL]  89.28,153.8 0 top
FID175  FIDUCIALUFIDUCIAL  [MICRO-FIDUCIAL]  106.93,167.54 0 top
FID176  FIDUCIALUFIDUCIAL  [MICRO-FIDUCIAL]  102.49,153.8 0 top
FID177  FIDUCIALUFIDUCIAL  [MICRO-FIDUCIAL]  120.14,167.54 0 top
FID178  FIDUCIALUFIDUCIAL  [MICRO-FIDUCIAL]  115.7,153.8 0 top
FID179  FIDUCIALUFIDUCIAL  [MICRO-FIDUCIAL]  133.35,167.54 0 top
FID180  FIDUCIALUFIDUCIAL  [MICRO-FIDUCIAL]  128.91,153.8 0 top
FID181  FIDUCIALUFIDUCIAL  [MICRO-FIDUCIAL]  14.48,185.83 0 top
FID182  FIDUCIALUFIDUCIAL  [MICRO-FIDUCIAL]  10.03,172.09 0 top
FID183  FIDUCIALUFIDUCIAL  [MICRO-FIDUCIAL]  27.69,185.83 0 top
FID184  FIDUCIALUFIDUCIAL  [MICRO-FIDUCIAL]  23.24,172.09 0 top
FID185  FIDUCIALUFIDUCIAL  [MICRO-FIDUCIAL]  40.89,185.83 0 top
FID186  FIDUCIALUFIDUCIAL  [MICRO-FIDUCIAL]  36.45,172.09 0 top
FID187  FIDUCIALUFIDUCIAL  [MICRO-FIDUCIAL]  54.1,185.83 0 top
FID188  FIDUCIALUFIDUCIAL  [MICRO-FIDUCIAL]  49.66,172.09 0 top
FID189  FIDUCIALUFIDUCIAL  [MICRO-FIDUCIAL]  67.31,185.83 0 top
FID190  FIDUCIALUFIDUCIAL  [MICRO-FIDUCIAL]  62.87,172.09 0 top
FID191  FIDUCIALUFIDUCIAL  [MICRO-FIDUCIAL]  80.52,185.83 0 top
FID192  FIDUCIALUFIDUCIAL  [MICRO-FIDUCIAL]  76.07,172.09 0 top
FID193  FIDUCIALUFIDUCIAL  [MICRO-FIDUCIAL]  93.73,185.83 0 top
FID194  FIDUCIALUFIDUCIAL  [MICRO-FIDUCIAL]  89.28,172.09 0 top
FID195  FIDUCIALUFIDUCIAL  [MICRO-FIDUCIAL]  106.93,185.83 0 top
FID196  FIDUCIALUFIDUCIAL  [MICRO-FIDUCIAL]  102.49,172.09 0 top
FID197  FIDUCIALUFIDUCIAL  [MICRO-FIDUCIAL]  120.14,185.83 0 top
FID198  FIDUCIALUFIDUCIAL  [MICRO-FIDUCIAL]  115.7,172.09 0 top
FID199  FIDUCIALUFIDUCIAL  [MICRO-FIDUCIAL]  133.35,185.83 0 top
FID200  FIDUCIALUFIDUCIAL  [MICRO-FIDUCIAL]  128.91,172.09 0 top
FID201  FIDUCIALUFIDUCIAL  [MICRO-FIDUCIAL]  14.48,204.11 0 top
FID202  FIDUCIALUFIDUCIAL  [MICRO-FIDUCIAL]  10.03,190.37 0 top
FID203  FIDUCIALUFIDUCIAL  [MICRO-FIDUCIAL]  27.69,204.11 0 top
FID204  FIDUCIALUFIDUCIAL  [MICRO-FIDUCIAL]  23.24,190.37 0 top
FID205  FIDUCIALUFIDUCIAL  [MICRO-FIDUCIAL]  40.89,204.11 0 top
FID206  FIDUCIALUFIDUCIAL  [MICRO-FIDUCIAL]  36.45,190.37 0 top
FID207  FIDUCIALUFIDUCIAL  [MICRO-FIDUCIAL]  54.1,204.11 0 top
FID208  FIDUCIALUFIDUCIAL  [MICRO-FIDUCIAL]  49.66,190.37 0 top
FID209  FIDUCIALUFIDUCIAL  [MICRO-FIDUCIAL]  67.31,204.11 0 top
FID210  FIDUCIALUFIDUCIAL  [MICRO-FIDUCIAL]  62.87,190.37 0 top
FID211  FIDUCIALUFIDUCIAL  [MICRO-FIDUCIAL]  80.52,204.11 0 top
FID212  FIDUCIALUFIDUCIAL  [MICRO-FIDUCIAL]  76.07,190.37 0 top
FID213  FIDUCIALUFIDUCIAL  [MICRO-FIDUCIAL]  93.73,204.11 0 top
FID214  FIDUCIALUFIDUCIAL  [MICRO-FIDUCIAL]  89.28,190.37 0 top
FID215  FIDUCIALUFIDUCIAL  [MICRO-FIDUCIAL]  106.93,204.11 0 top
FID216  FIDUCIALUFIDUCIAL  [MICRO-FIDUCIAL]  102.49,190.37 0 top
FID217  FIDUCIALUFIDUCIAL  [MICRO-FIDUCIAL]  120.14,204.11 0 top
FID218  FIDUCIALUFIDUCIAL  [MICRO-FIDUCIAL]  115.7,190.37 0 top
FID219  FIDUCIALUFIDUCIAL  [MICRO-FIDUCIAL]  133.35,204.11 0 top
FID220  FIDUCIALUFIDUCIAL  [MICRO-FIDUCIAL]  128.91,190.37 0 top
FID221  FIDUCIALUFIDUCIAL  [MICRO-FIDUCIAL]  14.48,222.4 0 top
FID222  FIDUCIALUFIDUCIAL  [MICRO-FIDUCIAL]  10.03,208.66 0 top
FID223  FIDUCIALUFIDUCIAL  [MICRO-FIDUCIAL]  27.69,222.4 0 top
FID224  FIDUCIALUFIDUCIAL  [MICRO-FIDUCIAL]  23.24,208.66 0 top
FID225  FIDUCIALUFIDUCIAL  [MICRO-FIDUCIAL]  40.89,222.4 0 top
FID226  FIDUCIALUFIDUCIAL  [MICRO-FIDUCIAL]  36.45,208.66 0 top
FID227  FIDUCIALUFIDUCIAL  [MICRO-FIDUCIAL]  54.1,222.4 0 top
FID228  FIDUCIALUFIDUCIAL  [MICRO-FIDUCIAL]  49.66,208.66 0 top
FID229  FIDUCIALUFIDUCIAL  [MICRO-FIDUCIAL]  67.31,222.4 0 top
FID230  FIDUCIALUFIDUCIAL  [MICRO-FIDUCIAL]  62.87,208.66 0 top
FID231  FIDUCIALUFIDUCIAL  [MICRO-FIDUCIAL]  80.52,222.4 0 top
FID232  FIDUCIALUFIDUCIAL  [MICRO-FIDUCIAL]  76.07,208.66 0 top
FID233  FIDUCIALUFIDUCIAL  [MICRO-FIDUCIAL]  93.73,222.4 0 top
FID234  FIDUCIALUFIDUCIAL  [MICRO-FIDUCIAL]  89.28,208.66 0 top
FID235  FIDUCIALUFIDUCIAL  [MICRO-FIDUCIAL]  106.93,222.4 0 top
FID236  FIDUCIALUFIDUCIAL  [MICRO-FIDUCIAL]  102.49,208.66 0 top
FID237  FIDUCIALUFIDUCIAL  [MICRO-FIDUCIAL]  120.14,222.4 0 top
FID238  FIDUCIALUFIDUCIAL  [MICRO-FIDUCIAL]  115.7,208.66 0 top
FID239  FIDUCIALUFIDUCIAL  [MICRO-FIDUCIAL]  133.35,222.4 0 top
FID240  FIDUCIALUFIDUCIAL  [MICRO-FIDUCIAL]  128.91,208.66 0 top
JP1  [1X07]  8.13,8.13 90 top
JP2  [1X07]  18.29,8.13 90 top
JP3  [1X07]  21.34,8.13 90 top
JP4  [1X07]  31.5,8.13 90 top
JP5  [1X07]  34.54,8.13 90 top
JP6  [1X07]  44.7,8.13 90 top
JP7  [1X07]  47.75,8.13 90 top
JP8  [1X07]  57.91,8.13 90 top
JP9  [1X07]  60.96,8.13 90 top
JP10  [1X07]  71.12,8.13 90 top
JP11  [1X07]  74.17,8.13 90 top
JP12  [1X07]  84.33,8.13 90 top
JP13  [1X07]  87.38,8.13 90 top
JP14  [1X07]  97.54,8.13 90 top
JP15  [1X07]  100.58,8.13 90 top
JP16  [1X07]  110.74,8.13 90 top
JP17  [1X07]  113.79,8.13 90 top
JP18  [1X07]  123.95,8.13 90 top
JP19  [1X07]  127,8.13 90 top
JP20  [1X07]  137.16,8.13 90 top
JP21  [1X07]  8.13,26.42 90 top
JP22  [1X07]  18.29,26.42 90 top
JP23  [1X07]  21.34,26.42 90 top
JP24  [1X07]  31.5,26.42 90 top
JP25  [1X07]  34.54,26.42 90 top
JP26  [1X07]  44.7,26.42 90 top
JP27  [1X07]  47.75,26.42 90 top
JP28  [1X07]  57.91,26.42 90 top
JP29  [1X07]  60.96,26.42 90 top
JP30  [1X07]  71.12,26.42 90 top
JP31  [1X07]  74.17,26.42 90 top
JP32  [1X07]  84.33,26.42 90 top
JP33  [1X07]  87.38,26.42 90 top
JP34  [1X07]  97.54,26.42 90 top
JP35  [1X07]  100.58,26.42 90 top
JP36  [1X07]  110.74,26.42 90 top
JP37  [1X07]  113.79,26.42 90 top
JP38  [1X07]  123.95,26.42 90 top
JP39  [1X07]  127,26.42 90 top
JP40  [1X07]  137.16,26.42 90 top
JP41  [1X07]  8.13,44.7 90 top
JP42  [1X07]  18.29,44.7 90 top
JP43  [1X07]  21.34,44.7 90 top
JP44  [1X07]  31.5,44.7 90 top
JP45  [1X07]  34.54,44.7 90 top
JP46  [1X07]  44.7,44.7 90 top
JP47  [1X07]  47.75,44.7 90 top
JP48  [1X07]  57.91,44.7 90 top
JP49  [1X07]  60.96,44.7 90 top
JP50  [1X07]  71.12,44.7 90 top
JP51  [1X07]  74.17,44.7 90 top
JP52  [1X07]  84.33,44.7 90 top
JP53  [1X07]  87.38,44.7 90 top
JP54  [1X07]  97.54,44.7 90 top
JP55  [1X07]  100.58,44.7 90 top
JP56  [1X07]  110.74,44.7 90 top
JP57  [1X07]  113.79,44.7 90 top
JP58  [1X07]  123.95,44.7 90 top
JP59  [1X07]  127,44.7 90 top
JP60  [1X07]  137.16,44.7 90 top
JP61  [1X07]  8.13,62.99 90 top
JP62  [1X07]  18.29,62.99 90 top
JP63  [1X07]  21.34,62.99 90 top
JP64  [1X07]  31.5,62.99 90 top
JP65  [1X07]  34.54,62.99 90 top
JP66  [1X07]  44.7,62.99 90 top
JP67  [1X07]  47.75,62.99 90 top
JP68  [1X07]  57.91,62.99 90 top
JP69  [1X07]  60.96,62.99 90 top
JP70  [1X07]  71.12,62.99 90 top
JP71  [1X07]  74.17,62.99 90 top
JP72  [1X07]  84.33,62.99 90 top
JP73  [1X07]  87.38,62.99 90 top
JP74  [1X07]  97.54,62.99 90 top
JP75  [1X07]  100.58,62.99 90 top
JP76  [1X07]  110.74,62.99 90 top
JP77  [1X07]  113.79,62.99 90 top
JP78  [1X07]  123.95,62.99 90 top
JP79  [1X07]  127,62.99 90 top
JP80  [1X07]  137.16,62.99 90 top
JP81  [1X07]  8.13,81.28 90 top
JP82  [1X07]  18.29,81.28 90 top
JP83  [1X07]  21.34,81.28 90 top
JP84  [1X07]  31.5,81.28 90 top
JP85  [1X07]  34.54,81.28 90 top
JP86  [1X07]  44.7,81.28 90 top
JP87  [1X07]  47.75,81.28 90 top
JP88  [1X07]  57.91,81.28 90 top
JP89  [1X07]  60.96,81.28 90 top
JP90  [1X07]  71.12,81.28 90 top
JP91  [1X07]  74.17,81.28 90 top
JP92  [1X07]  84.33,81.28 90 top
JP93  [1X07]  87.38,81.28 90 top
JP94  [1X07]  97.54,81.28 90 top
JP95  [1X07]  100.58,81.28 90 top
JP96  [1X07]  110.74,81.28 90 top
JP97  [1X07]  113.79,81.28 90 top
JP98  [1X07]  123.95,81.28 90 top
JP99  [1X07]  127,81.28 90 top
JP100  [1X07]  137.16,81.28 90 top
JP101  [1X07]  8.13,99.57 90 top
JP102  [1X07]  18.29,99.57 90 top
JP103  [1X07]  21.34,99.57 90 top
JP104  [1X07]  31.5,99.57 90 top
JP105  [1X07]  34.54,99.57 90 top
JP106  [1X07]  44.7,99.57 90 top
JP107  [1X07]  47.75,99.57 90 top
JP108  [1X07]  57.91,99.57 90 top
JP109  [1X07]  60.96,99.57 90 top
JP110  [1X07]  71.12,99.57 90 top
JP111  [1X07]  74.17,99.57 90 top
JP112  [1X07]  84.33,99.57 90 top
JP113  [1X07]  87.38,99.57 90 top
JP114  [1X07]  97.54,99.57 90 top
JP115  [1X07]  100.58,99.57 90 top
JP116  [1X07]  110.74,99.57 90 top
JP117  [1X07]  113.79,99.57 90 top
JP118  [1X07]  123.95,99.57 90 top
JP119  [1X07]  127,99.57 90 top
JP120  [1X07]  137.16,99.57 90 top
JP121  [1X07]  8.13,117.86 90 top
JP122  [1X07]  18.29,117.86 90 top
JP123  [1X07]  21.34,117.86 90 top
JP124  [1X07]  31.5,117.86 90 top
JP125  [1X07]  34.54,117.86 90 top
JP126  [1X07]  44.7,117.86 90 top
JP127  [1X07]  47.75,117.86 90 top
JP128  [1X07]  57.91,117.86 90 top
JP129  [1X07]  60.96,117.86 90 top
JP130  [1X07]  71.12,117.86 90 top
JP131  [1X07]  74.17,117.86 90 top
JP132  [1X07]  84.33,117.86 90 top
JP133  [1X07]  87.38,117.86 90 top
JP134  [1X07]  97.54,117.86 90 top
JP135  [1X07]  100.58,117.86 90 top
JP136  [1X07]  110.74,117.86 90 top
JP137  [1X07]  113.79,117.86 90 top
JP138  [1X07]  123.95,117.86 90 top
JP139  [1X07]  127,117.86 90 top
JP140  [1X07]  137.16,117.86 90 top
JP141  [1X07]  8.13,136.14 90 top
JP142  [1X07]  18.29,136.14 90 top
JP143  [1X07]  21.34,136.14 90 top
JP144  [1X07]  31.5,136.14 90 top
JP145  [1X07]  34.54,136.14 90 top
JP146  [1X07]  44.7,136.14 90 top
JP147  [1X07]  47.75,136.14 90 top
JP148  [1X07]  57.91,136.14 90 top
JP149  [1X07]  60.96,136.14 90 top
JP150  [1X07]  71.12,136.14 90 top
JP151  [1X07]  74.17,136.14 90 top
JP152  [1X07]  84.33,136.14 90 top
JP153  [1X07]  87.38,136.14 90 top
JP154  [1X07]  97.54,136.14 90 top
JP155  [1X07]  100.58,136.14 90 top
JP156  [1X07]  110.74,136.14 90 top
JP157  [1X07]  113.79,136.14 90 top
JP158  [1X07]  123.95,136.14 90 top
JP159  [1X07]  127,136.14 90 top
JP160  [1X07]  137.16,136.14 90 top
JP161  [1X07]  8.13,154.43 90 top
JP162  [1X07]  18.29,154.43 90 top
JP163  [1X07]  21.34,154.43 90 top
JP164  [1X07]  31.5,154.43 90 top
JP165  [1X07]  34.54,154.43 90 top
JP166  [1X07]  44.7,154.43 90 top
JP167  [1X07]  47.75,154.43 90 top
JP168  [1X07]  57.91,154.43 90 top
JP169  [1X07]  60.96,154.43 90 top
JP170  [1X07]  71.12,154.43 90 top
JP171  [1X07]  74.17,154.43 90 top
JP172  [1X07]  84.33,154.43 90 top
JP173  [1X07]  87.38,154.43 90 top
JP174  [1X07]  97.54,154.43 90 top
JP175  [1X07]  100.58,154.43 90 top
JP176  [1X07]  110.74,154.43 90 top
JP177  [1X07]  113.79,154.43 90 top
JP178  [1X07]  123.95,154.43 90 top
JP179  [1X07]  127,154.43 90 top
JP180  [1X07]  137.16,154.43 90 top
JP181  [1X07]  8.13,172.72 90 top
JP182  [1X07]  18.29,172.72 90 top
JP183  [1X07]  21.34,172.72 90 top
JP184  [1X07]  31.5,172.72 90 top
JP185  [1X07]  34.54,172.72 90 top
JP186  [1X07]  44.7,172.72 90 top
JP187  [1X07]  47.75,172.72 90 top
JP188  [1X07]  57.91,172.72 90 top
JP189  [1X07]  60.96,172.72 90 top
JP190  [1X07]  71.12,172.72 90 top
JP191  [1X07]  74.17,172.72 90 top
JP192  [1X07]  84.33,172.72 90 top
JP193  [1X07]  87.38,172.72 90 top
JP194  [1X07]  97.54,172.72 90 top
JP195  [1X07]  100.58,172.72 90 top
JP196  [1X07]  110.74,172.72 90 top
JP197  [1X07]  113.79,172.72 90 top
JP198  [1X07]  123.95,172.72 90 top
JP199  [1X07]  127,172.72 90 top
JP200  [1X07]  137.16,172.72 90 top
JP201  [1X07]  8.13,191.01 90 top
JP202  [1X07]  18.29,191.01 90 top
JP203  [1X07]  21.34,191.01 90 top
JP204  [1X07]  31.5,191.01 90 top
JP205  [1X07]  34.54,191.01 90 top
JP206  [1X07]  44.7,191.01 90 top
JP207  [1X07]  47.75,191.01 90 top
JP208  [1X07]  57.91,191.01 90 top
JP209  [1X07]  60.96,191.01 90 top
JP210  [1X07]  71.12,191.01 90 top
JP211  [1X07]  74.17,191.01 90 top
JP212  [1X07]  84.33,191.01 90 top
JP213  [1X07]  87.38,191.01 90 top
JP214  [1X07]  97.54,191.01 90 top
JP215  [1X07]  100.58,191.01 90 top
JP216  [1X07]  110.74,191.01 90 top
JP217  [1X07]  113.79,191.01 90 top
JP218  [1X07]  123.95,191.01 90 top
JP219  [1X07]  127,191.01 90 top
JP220  [1X07]  137.16,191.01 90 top
JP221  [1X07]  8.13,209.3 90 top
JP222  [1X07]  18.29,209.3 90 top
JP223  [1X07]  21.34,209.3 90 top
JP224  [1X07]  31.5,209.3 90 top
JP225  [1X07]  34.54,209.3 90 top
JP226  [1X07]  44.7,209.3 90 top
JP227  [1X07]  47.75,209.3 90 top
JP228  [1X07]  57.91,209.3 90 top
JP229  [1X07]  60.96,209.3 90 top
JP230  [1X07]  71.12,209.3 90 top
JP231  [1X07]  74.17,209.3 90 top
JP232  [1X07]  84.33,209.3 90 top
JP233  [1X07]  87.38,209.3 90 top
JP234  [1X07]  97.54,209.3 90 top
JP235  [1X07]  100.58,209.3 90 top
JP236  [1X07]  110.74,209.3 90 top
JP237  [1X07]  113.79,209.3 90 top
JP238  [1X07]  123.95,209.3 90 top
JP239  [1X07]  127,209.3 90 top
JP240  [1X07]  137.16,209.3 90 top
LOGO1  LOGO-SFESK  [SFE-LOGO-FLAME]  14.86,7.75 0 top
LOGO2  OSHW-LOGOS  [OSHW-LOGO-S]  11.3,9.14 0 top
LOGO3  LOGO-SFESK  [SFE-LOGO-FLAME]  28.07,7.75 0 top
LOGO4  OSHW-LOGOS  [OSHW-LOGO-S]  24.51,9.14 0 top
LOGO5  LOGO-SFESK  [SFE-LOGO-FLAME]  41.27,7.75 0 top
LOGO6  OSHW-LOGOS  [OSHW-LOGO-S]  37.72,9.14 0 top
LOGO7  LOGO-SFESK  [SFE-LOGO-FLAME]  54.48,7.75 0 top
LOGO8  OSHW-LOGOS  [OSHW-LOGO-S]  50.93,9.14 0 top
LOGO9  LOGO-SFESK  [SFE-LOGO-FLAME]  67.69,7.75 0 top
LOGO10  OSHW-LOGOS  [OSHW-LOGO-S]  64.14,9.14 0 top
LOGO11  LOGO-SFESK  [SFE-LOGO-FLAME]  80.9,7.75 0 top
LOGO12  OSHW-LOGOS  [OSHW-LOGO-S]  77.34,9.14 0 top
LOGO13  LOGO-SFESK  [SFE-LOGO-FLAME]  94.11,7.75 0 top
LOGO14  OSHW-LOGOS  [OSHW-LOGO-S]  90.55,9.14 0 top
LOGO15  LOGO-SFESK  [SFE-LOGO-FLAME]  107.31,7.75 0 top
LOGO16  OSHW-LOGOS  [OSHW-LOGO-S]  103.76,9.14 0 top
LOGO17  LOGO-SFESK  [SFE-LOGO-FLAME]  120.52,7.75 0 top
LOGO18  OSHW-LOGOS  [OSHW-LOGO-S]  116.97,9.14 0 top
LOGO19  LOGO-SFESK  [SFE-LOGO-FLAME]  133.73,7.75 0 top
LOGO20  OSHW-LOGOS  [OSHW-LOGO-S]  130.18,9.14 0 top
LOGO21  LOGO-SFESK  [SFE-LOGO-FLAME]  14.86,26.04 0 top
LOGO22  OSHW-LOGOS  [OSHW-LOGO-S]  11.3,27.43 0 top
LOGO23  LOGO-SFESK  [SFE-LOGO-FLAME]  28.07,26.04 0 top
LOGO24  OSHW-LOGOS  [OSHW-LOGO-S]  24.51,27.43 0 top
LOGO25  LOGO-SFESK  [SFE-LOGO-FLAME]  41.27,26.04 0 top
LOGO26  OSHW-LOGOS  [OSHW-LOGO-S]  37.72,27.43 0 top
LOGO27  LOGO-SFESK  [SFE-LOGO-FLAME]  54.48,26.04 0 top
LOGO28  OSHW-LOGOS  [OSHW-LOGO-S]  50.93,27.43 0 top
LOGO29  LOGO-SFESK  [SFE-LOGO-FLAME]  67.69,26.04 0 top
LOGO30  OSHW-LOGOS  [OSHW-LOGO-S]  64.14,27.43 0 top
LOGO31  LOGO-SFESK  [SFE-LOGO-FLAME]  80.9,26.04 0 top
LOGO32  OSHW-LOGOS  [OSHW-LOGO-S]  77.34,27.43 0 top
LOGO33  LOGO-SFESK  [SFE-LOGO-FLAME]  94.11,26.04 0 top
LOGO34  OSHW-LOGOS  [OSHW-LOGO-S]  90.55,27.43 0 top
LOGO35  LOGO-SFESK  [SFE-LOGO-FLAME]  107.31,26.04 0 top
LOGO36  OSHW-LOGOS  [OSHW-LOGO-S]  103.76,27.43 0 top
LOGO37  LOGO-SFESK  [SFE-LOGO-FLAME]  120.52,26.04 0 top
LOGO38  OSHW-LOGOS  [OSHW-LOGO-S]  116.97,27.43 0 top
LOGO39  LOGO-SFESK  [SFE-LOGO-FLAME]  133.73,26.04 0 top
LOGO40  OSHW-LOGOS  [OSHW-LOGO-S]  130.18,27.43 0 top
LOGO41  LOGO-SFESK  [SFE-LOGO-FLAME]  14.86,44.32 0 top
LOGO42  OSHW-LOGOS  [OSHW-LOGO-S]  11.3,45.72 0 top
LOGO43  LOGO-SFESK  [SFE-LOGO-FLAME]  28.07,44.32 0 top
LOGO44  OSHW-LOGOS  [OSHW-LOGO-S]  24.51,45.72 0 top
LOGO45  LOGO-SFESK  [SFE-LOGO-FLAME]  41.27,44.32 0 top
LOGO46  OSHW-LOGOS  [OSHW-LOGO-S]  37.72,45.72 0 top
LOGO47  LOGO-SFESK  [SFE-LOGO-FLAME]  54.48,44.32 0 top
LOGO48  OSHW-LOGOS  [OSHW-LOGO-S]  50.93,45.72 0 top
LOGO49  LOGO-SFESK  [SFE-LOGO-FLAME]  67.69,44.32 0 top
LOGO50  OSHW-LOGOS  [OSHW-LOGO-S]  64.14,45.72 0 top
LOGO51  LOGO-SFESK  [SFE-LOGO-FLAME]  80.9,44.32 0 top
LOGO52  OSHW-LOGOS  [OSHW-LOGO-S]  77.34,45.72 0 top
LOGO53  LOGO-SFESK  [SFE-LOGO-FLAME]  94.11,44.32 0 top
LOGO54  OSHW-LOGOS  [OSHW-LOGO-S]  90.55,45.72 0 top
LOGO55  LOGO-SFESK  [SFE-LOGO-FLAME]  107.31,44.32 0 top
LOGO56  OSHW-LOGOS  [OSHW-LOGO-S]  103.76,45.72 0 top
LOGO57  LOGO-SFESK  [SFE-LOGO-FLAME]  120.52,44.32 0 top
LOGO58  OSHW-LOGOS  [OSHW-LOGO-S]  116.97,45.72 0 top
LOGO59  LOGO-SFESK  [SFE-LOGO-FLAME]  133.73,44.32 0 top
LOGO60  OSHW-LOGOS  [OSHW-LOGO-S]  130.18,45.72 0 top
LOGO61  LOGO-SFESK  [SFE-LOGO-FLAME]  14.86,62.61 0 top
LOGO62  OSHW-LOGOS  [OSHW-LOGO-S]  11.3,64.01 0 top
LOGO63  LOGO-SFESK  [SFE-LOGO-FLAME]  28.07,62.61 0 top
LOGO64  OSHW-LOGOS  [OSHW-LOGO-S]  24.51,64.01 0 top
LOGO65  LOGO-SFESK  [SFE-LOGO-FLAME]  41.27,62.61 0 top
LOGO66  OSHW-LOGOS  [OSHW-LOGO-S]  37.72,64.01 0 top
LOGO67  LOGO-SFESK  [SFE-LOGO-FLAME]  54.48,62.61 0 top
LOGO68  OSHW-LOGOS  [OSHW-LOGO-S]  50.93,64.01 0 top
LOGO69  LOGO-SFESK  [SFE-LOGO-FLAME]  67.69,62.61 0 top
LOGO70  OSHW-LOGOS  [OSHW-LOGO-S]  64.14,64.01 0 top
LOGO71  LOGO-SFESK  [SFE-LOGO-FLAME]  80.9,62.61 0 top
LOGO72  OSHW-LOGOS  [OSHW-LOGO-S]  77.34,64.01 0 top
LOGO73  LOGO-SFESK  [SFE-LOGO-FLAME]  94.11,62.61 0 top
LOGO74  OSHW-LOGOS  [OSHW-LOGO-S]  90.55,64.01 0 top
LOGO75  LOGO-SFESK  [SFE-LOGO-FLAME]  107.31,62.61 0 top
LOGO76  OSHW-LOGOS  [OSHW-LOGO-S]  103.76,64.01 0 top
LOGO77  LOGO-SFESK  [SFE-LOGO-FLAME]  120.52,62.61 0 top
LOGO78  OSHW-LOGOS  [OSHW-LOGO-S]  116.97,64.01 0 top
LOGO79  LOGO-SFESK  [SFE-LOGO-FLAME]  133.73,62.61 0 top
LOGO80  OSHW-LOGOS  [OSHW-LOGO-S]  130.18,64.01 0 top
LOGO81  LOGO-SFESK  [SFE-LOGO-FLAME]  14.86,80.9 0 top
LOGO82  OSHW-LOGOS  [OSHW-LOGO-S]  11.3,82.3 0 top
LOGO83  LOGO-SFESK  [SFE-LOGO-FLAME]  28.07,80.9 0 top
LOGO84  OSHW-LOGOS  [OSHW-LOGO-S]  24.51,82.3 0 top
LOGO85  LOGO-SFESK  [SFE-LOGO-FLAME]  41.27,80.9 0 top
LOGO86  OSHW-LOGOS  [OSHW-LOGO-S]  37.72,82.3 0 top
LOGO87  LOGO-SFESK  [SFE-LOGO-FLAME]  54.48,80.9 0 top
LOGO88  OSHW-LOGOS  [OSHW-LOGO-S]  50.93,82.3 0 top
LOGO89  LOGO-SFESK  [SFE-LOGO-FLAME]  67.69,80.9 0 top
LOGO90  OSHW-LOGOS  [OSHW-LOGO-S]  64.14,82.3 0 top
LOGO91  LOGO-SFESK  [SFE-LOGO-FLAME]  80.9,80.9 0 top
LOGO92  OSHW-LOGOS  [OSHW-LOGO-S]  77.34,82.3 0 top
LOGO93  LOGO-SFESK  [SFE-LOGO-FLAME]  94.11,80.9 0 top
LOGO94  OSHW-LOGOS  [OSHW-LOGO-S]  90.55,82.3 0 top
LOGO95  LOGO-SFESK  [SFE-LOGO-FLAME]  107.31,80.9 0 top
LOGO96  OSHW-LOGOS  [OSHW-LOGO-S]  103.76,82.3 0 top
LOGO97  LOGO-SFESK  [SFE-LOGO-FLAME]  120.52,80.9 0 top
LOGO98  OSHW-LOGOS  [OSHW-LOGO-S]  116.97,82.3 0 top
LOGO99  LOGO-SFESK  [SFE-LOGO-FLAME]  133.73,80.9 0 top
LOGO100  OSHW-LOGOS  [OSHW-LOGO-S]  130.18,82.3 0 top
LOGO101  LOGO-SFESK  [SFE-LOGO-FLAME]  14.86,99.19 0 top
LOGO102  OSHW-LOGOS  [OSHW-LOGO-S]  11.3,100.58 0 top
LOGO103  LOGO-SFESK  [SFE-LOGO-FLAME]  28.07,99.19 0 top
LOGO104  OSHW-LOGOS  [OSHW-LOGO-S]  24.51,100.58 0 top
LOGO105  LOGO-SFESK  [SFE-LOGO-FLAME]  41.27,99.19 0 top
LOGO106  OSHW-LOGOS  [OSHW-LOGO-S]  37.72,100.58 0 top
LOGO107  LOGO-SFESK  [SFE-LOGO-FLAME]  54.48,99.19 0 top
LOGO108  OSHW-LOGOS  [OSHW-LOGO-S]  50.93,100.58 0 top
LOGO109  LOGO-SFESK  [SFE-LOGO-FLAME]  67.69,99.19 0 top
LOGO110  OSHW-LOGOS  [OSHW-LOGO-S]  64.14,100.58 0 top
LOGO111  LOGO-SFESK  [SFE-LOGO-FLAME]  80.9,99.19 0 top
LOGO112  OSHW-LOGOS  [OSHW-LOGO-S]  77.34,100.58 0 top
LOGO113  LOGO-SFESK  [SFE-LOGO-FLAME]  94.11,99.19 0 top
LOGO114  OSHW-LOGOS  [OSHW-LOGO-S]  90.55,100.58 0 top
LOGO115  LOGO-SFESK  [SFE-LOGO-FLAME]  107.31,99.19 0 top
LOGO116  OSHW-LOGOS  [OSHW-LOGO-S]  103.76,100.58 0 top
LOGO117  LOGO-SFESK  [SFE-LOGO-FLAME]  120.52,99.19 0 top
LOGO118  OSHW-LOGOS  [OSHW-LOGO-S]  116.97,100.58 0 top
LOGO119  LOGO-SFESK  [SFE-LOGO-FLAME]  133.73,99.19 0 top
LOGO120  OSHW-LOGOS  [OSHW-LOGO-S]  130.18,100.58 0 top
LOGO121  LOGO-SFESK  [SFE-LOGO-FLAME]  14.86,117.47 0 top
LOGO122  OSHW-LOGOS  [OSHW-LOGO-S]  11.3,118.87 0 top
LOGO123  LOGO-SFESK  [SFE-LOGO-FLAME]  28.07,117.47 0 top
LOGO124  OSHW-LOGOS  [OSHW-LOGO-S]  24.51,118.87 0 top
LOGO125  LOGO-SFESK  [SFE-LOGO-FLAME]  41.27,117.47 0 top
LOGO126  OSHW-LOGOS  [OSHW-LOGO-S]  37.72,118.87 0 top
LOGO127  LOGO-SFESK  [SFE-LOGO-FLAME]  54.48,117.47 0 top
LOGO128  OSHW-LOGOS  [OSHW-LOGO-S]  50.93,118.87 0 top
LOGO129  LOGO-SFESK  [SFE-LOGO-FLAME]  67.69,117.47 0 top
LOGO130  OSHW-LOGOS  [OSHW-LOGO-S]  64.14,118.87 0 top
LOGO131  LOGO-SFESK  [SFE-LOGO-FLAME]  80.9,117.47 0 top
LOGO132  OSHW-LOGOS  [OSHW-LOGO-S]  77.34,118.87 0 top
LOGO133  LOGO-SFESK  [SFE-LOGO-FLAME]  94.11,117.47 0 top
LOGO134  OSHW-LOGOS  [OSHW-LOGO-S]  90.55,118.87 0 top
LOGO135  LOGO-SFESK  [SFE-LOGO-FLAME]  107.31,117.47 0 top
LOGO136  OSHW-LOGOS  [OSHW-LOGO-S]  103.76,118.87 0 top
LOGO137  LOGO-SFESK  [SFE-LOGO-FLAME]  120.52,117.47 0 top
LOGO138  OSHW-LOGOS  [OSHW-LOGO-S]  116.97,118.87 0 top
LOGO139  LOGO-SFESK  [SFE-LOGO-FLAME]  133.73,117.47 0 top
LOGO140  OSHW-LOGOS  [OSHW-LOGO-S]  130.18,118.87 0 top
LOGO141  LOGO-SFESK  [SFE-LOGO-FLAME]  14.86,135.76 0 top
LOGO142  OSHW-LOGOS  [OSHW-LOGO-S]  11.3,137.16 0 top
LOGO143  LOGO-SFESK  [SFE-LOGO-FLAME]  28.07,135.76 0 top
LOGO144  OSHW-LOGOS  [OSHW-LOGO-S]  24.51,137.16 0 top
LOGO145  LOGO-SFESK  [SFE-LOGO-FLAME]  41.27,135.76 0 top
LOGO146  OSHW-LOGOS  [OSHW-LOGO-S]  37.72,137.16 0 top
LOGO147  LOGO-SFESK  [SFE-LOGO-FLAME]  54.48,135.76 0 top
LOGO148  OSHW-LOGOS  [OSHW-LOGO-S]  50.93,137.16 0 top
LOGO149  LOGO-SFESK  [SFE-LOGO-FLAME]  67.69,135.76 0 top
LOGO150  OSHW-LOGOS  [OSHW-LOGO-S]  64.14,137.16 0 top
LOGO151  LOGO-SFESK  [SFE-LOGO-FLAME]  80.9,135.76 0 top
LOGO152  OSHW-LOGOS  [OSHW-LOGO-S]  77.34,137.16 0 top
LOGO153  LOGO-SFESK  [SFE-LOGO-FLAME]  94.11,135.76 0 top
LOGO154  OSHW-LOGOS  [OSHW-LOGO-S]  90.55,137.16 0 top
LOGO155  LOGO-SFESK  [SFE-LOGO-FLAME]  107.31,135.76 0 top
LOGO156  OSHW-LOGOS  [OSHW-LOGO-S]  103.76,137.16 0 top
LOGO157  LOGO-SFESK  [SFE-LOGO-FLAME]  120.52,135.76 0 top
LOGO158  OSHW-LOGOS  [OSHW-LOGO-S]  116.97,137.16 0 top
LOGO159  LOGO-SFESK  [SFE-LOGO-FLAME]  133.73,135.76 0 top
LOGO160  OSHW-LOGOS  [OSHW-LOGO-S]  130.18,137.16 0 top
LOGO161  LOGO-SFESK  [SFE-LOGO-FLAME]  14.86,154.05 0 top
LOGO162  OSHW-LOGOS  [OSHW-LOGO-S]  11.3,155.45 0 top
LOGO163  LOGO-SFESK  [SFE-LOGO-FLAME]  28.07,154.05 0 top
LOGO164  OSHW-LOGOS  [OSHW-LOGO-S]  24.51,155.45 0 top
LOGO165  LOGO-SFESK  [SFE-LOGO-FLAME]  41.27,154.05 0 top
LOGO166  OSHW-LOGOS  [OSHW-LOGO-S]  37.72,155.45 0 top
LOGO167  LOGO-SFESK  [SFE-LOGO-FLAME]  54.48,154.05 0 top
LOGO168  OSHW-LOGOS  [OSHW-LOGO-S]  50.93,155.45 0 top
LOGO169  LOGO-SFESK  [SFE-LOGO-FLAME]  67.69,154.05 0 top
LOGO170  OSHW-LOGOS  [OSHW-LOGO-S]  64.14,155.45 0 top
LOGO171  LOGO-SFESK  [SFE-LOGO-FLAME]  80.9,154.05 0 top
LOGO172  OSHW-LOGOS  [OSHW-LOGO-S]  77.34,155.45 0 top
LOGO173  LOGO-SFESK  [SFE-LOGO-FLAME]  94.11,154.05 0 top
LOGO174  OSHW-LOGOS  [OSHW-LOGO-S]  90.55,155.45 0 top
LOGO175  LOGO-SFESK  [SFE-LOGO-FLAME]  107.31,154.05 0 top
LOGO176  OSHW-LOGOS  [OSHW-LOGO-S]  103.76,155.45 0 top
LOGO177  LOGO-SFESK  [SFE-LOGO-FLAME]  120.52,154.05 0 top
LOGO178  OSHW-LOGOS  [OSHW-LOGO-S]  116.97,155.45 0 top
LOGO179  LOGO-SFESK  [SFE-LOGO-FLAME]  133.73,154.05 0 top
LOGO180  OSHW-LOGOS  [OSHW-LOGO-S]  130.18,155.45 0 top
LOGO181  LOGO-SFESK  [SFE-LOGO-FLAME]  14.86,172.34 0 top
LOGO182  OSHW-LOGOS  [OSHW-LOGO-S]  11.3,173.74 0 top
LOGO183  LOGO-SFESK  [SFE-LOGO-FLAME]  28.07,172.34 0 top
LOGO184  OSHW-LOGOS  [OSHW-LOGO-S]  24.51,173.74 0 top
LOGO185  LOGO-SFESK  [SFE-LOGO-FLAME]  41.27,172.34 0 top
LOGO186  OSHW-LOGOS  [OSHW-LOGO-S]  37.72,173.74 0 top
LOGO187  LOGO-SFESK  [SFE-LOGO-FLAME]  54.48,172.34 0 top
LOGO188  OSHW-LOGOS  [OSHW-LOGO-S]  50.93,173.74 0 top
LOGO189  LOGO-SFESK  [SFE-LOGO-FLAME]  67.69,172.34 0 top
LOGO190  OSHW-LOGOS  [OSHW-LOGO-S]  64.14,173.74 0 top
LOGO191  LOGO-SFESK  [SFE-LOGO-FLAME]  80.9,172.34 0 top
LOGO192  OSHW-LOGOS  [OSHW-LOGO-S]  77.34,173.74 0 top
LOGO193  LOGO-SFESK  [SFE-LOGO-FLAME]  94.11,172.34 0 top
LOGO194  OSHW-LOGOS  [OSHW-LOGO-S]  90.55,173.74 0 top
LOGO195  LOGO-SFESK  [SFE-LOGO-FLAME]  107.31,172.34 0 top
LOGO196  OSHW-LOGOS  [OSHW-LOGO-S]  103.76,173.74 0 top
LOGO197  LOGO-SFESK  [SFE-LOGO-FLAME]  120.52,172.34 0 top
LOGO198  OSHW-LOGOS  [OSHW-LOGO-S]  116.97,173.74 0 top
LOGO199  LOGO-SFESK  [SFE-LOGO-FLAME]  133.73,172.34 0 top
LOGO200  OSHW-LOGOS  [OSHW-LOGO-S]  130.18,173.74 0 top
LOGO201  LOGO-SFESK  [SFE-LOGO-FLAME]  14.86,190.63 0 top
LOGO202  OSHW-LOGOS  [OSHW-LOGO-S]  11.3,192.02 0 top
LOGO203  LOGO-SFESK  [SFE-LOGO-FLAME]  28.07,190.63 0 top
LOGO204  OSHW-LOGOS  [OSHW-LOGO-S]  24.51,192.02 0 top
LOGO205  LOGO-SFESK  [SFE-LOGO-FLAME]  41.27,190.63 0 top
LOGO206  OSHW-LOGOS  [OSHW-LOGO-S]  37.72,192.02 0 top
LOGO207  LOGO-SFESK  [SFE-LOGO-FLAME]  54.48,190.63 0 top
LOGO208  OSHW-LOGOS  [OSHW-LOGO-S]  50.93,192.02 0 top
LOGO209  LOGO-SFESK  [SFE-LOGO-FLAME]  67.69,190.63 0 top
LOGO210  OSHW-LOGOS  [OSHW-LOGO-S]  64.14,192.02 0 top
LOGO211  LOGO-SFESK  [SFE-LOGO-FLAME]  80.9,190.63 0 top
LOGO212  OSHW-LOGOS  [OSHW-LOGO-S]  77.34,192.02 0 top
LOGO213  LOGO-SFESK  [SFE-LOGO-FLAME]  94.11,190.63 0 top
LOGO214  OSHW-LOGOS  [OSHW-LOGO-S]  90.55,192.02 0 top
LOGO215  LOGO-SFESK  [SFE-LOGO-FLAME]  107.31,190.63 0 top
LOGO216  OSHW-LOGOS  [OSHW-LOGO-S]  103.76,192.02 0 top
LOGO217  LOGO-SFESK  [SFE-LOGO-FLAME]  120.52,190.63 0 top
LOGO218  OSHW-LOGOS  [OSHW-LOGO-S]  116.97,192.02 0 top
LOGO219  LOGO-SFESK  [SFE-LOGO-FLAME]  133.73,190.63 0 top
LOGO220  OSHW-LOGOS  [OSHW-LOGO-S]  130.18,192.02 0 top
LOGO221  LOGO-SFESK  [SFE-LOGO-FLAME]  14.86,208.91 0 top
LOGO222  OSHW-LOGOS  [OSHW-LOGO-S]  11.3,210.31 0 top
LOGO223  LOGO-SFESK  [SFE-LOGO-FLAME]  28.07,208.91 0 top
LOGO224  OSHW-LOGOS  [OSHW-LOGO-S]  24.51,210.31 0 top
LOGO225  LOGO-SFESK  [SFE-LOGO-FLAME]  41.27,208.91 0 top
LOGO226  OSHW-LOGOS  [OSHW-LOGO-S]  37.72,210.31 0 top
LOGO227  LOGO-SFESK  [SFE-LOGO-FLAME]  54.48,208.91 0 top
LOGO228  OSHW-LOGOS  [OSHW-LOGO-S]  50.93,210.31 0 top
LOGO229  LOGO-SFESK  [SFE-LOGO-FLAME]  67.69,208.91 0 top
LOGO230  OSHW-LOGOS  [OSHW-LOGO-S]  64.14,210.31 0 top
LOGO231  LOGO-SFESK  [SFE-LOGO-FLAME]  80.9,208.91 0 top
LOGO232  OSHW-LOGOS  [OSHW-LOGO-S]  77.34,210.31 0 top
LOGO233  LOGO-SFESK  [SFE-LOGO-FLAME]  94.11,208.91 0 top
LOGO234  OSHW-LOGOS  [OSHW-LOGO-S]  90.55,210.31 0 top
LOGO235  LOGO-SFESK  [SFE-LOGO-FLAME]  107.31,208.91 0 top
LOGO236  OSHW-LOGOS  [OSHW-LOGO-S]  103.76,210.31 0 top
LOGO237  LOGO-SFESK  [SFE-LOGO-FLAME]  120.52,208.91 0 top
LOGO238  OSHW-LOGOS  [OSHW-LOGO-S]  116.97,210.31 0 top
LOGO239  LOGO-SFESK  [SFE-LOGO-FLAME]  133.73,208.91 0 top
LOGO240  OSHW-LOGOS  [OSHW-LOGO-S]  130.18,210.31 0 top
SJ1  SOLDERJUMPERNC2  [SJ_2S-NOTRACE]  13.21,23.37 270 top
SJ2  SOLDERJUMPERNC2  [SJ_2S-NOTRACE]  26.42,23.37 270 top
SJ3  SOLDERJUMPERNC2  [SJ_2S-NOTRACE]  39.62,23.37 270 top
SJ4  SOLDERJUMPERNC2  [SJ_2S-NOTRACE]  52.83,23.37 270 top
SJ5  SOLDERJUMPERNC2  [SJ_2S-NOTRACE]  66.04,23.37 270 top
SJ6  SOLDERJUMPERNC2  [SJ_2S-NOTRACE]  79.25,23.37 270 top
SJ7  SOLDERJUMPERNC2  [SJ_2S-NOTRACE]  92.46,23.37 270 top
SJ8  SOLDERJUMPERNC2  [SJ_2S-NOTRACE]  105.66,23.37 270 top
SJ9  SOLDERJUMPERNC2  [SJ_2S-NOTRACE]  118.87,23.37 270 top
SJ10  SOLDERJUMPERNC2  [SJ_2S-NOTRACE]  132.08,23.37 270 top
SJ11  SOLDERJUMPERNC2  [SJ_2S-NOTRACE]  13.21,41.66 270 top
SJ12  SOLDERJUMPERNC2  [SJ_2S-NOTRACE]  26.42,41.66 270 top
SJ13  SOLDERJUMPERNC2  [SJ_2S-NOTRACE]  39.62,41.66 270 top
SJ14  SOLDERJUMPERNC2  [SJ_2S-NOTRACE]  52.83,41.66 270 top
SJ15  SOLDERJUMPERNC2  [SJ_2S-NOTRACE]  66.04,41.66 270 top
SJ16  SOLDERJUMPERNC2  [SJ_2S-NOTRACE]  79.25,41.66 270 top
SJ17  SOLDERJUMPERNC2  [SJ_2S-NOTRACE]  92.46,41.66 270 top
SJ18  SOLDERJUMPERNC2  [SJ_2S-NOTRACE]  105.66,41.66 270 top
SJ19  SOLDERJUMPERNC2  [SJ_2S-NOTRACE]  118.87,41.66 270 top